# EAGLE board axiom_beta_sensor_cmv12000_zif_v0.18_r1.2 (EAGLE 7.0.0), part 1 of 3
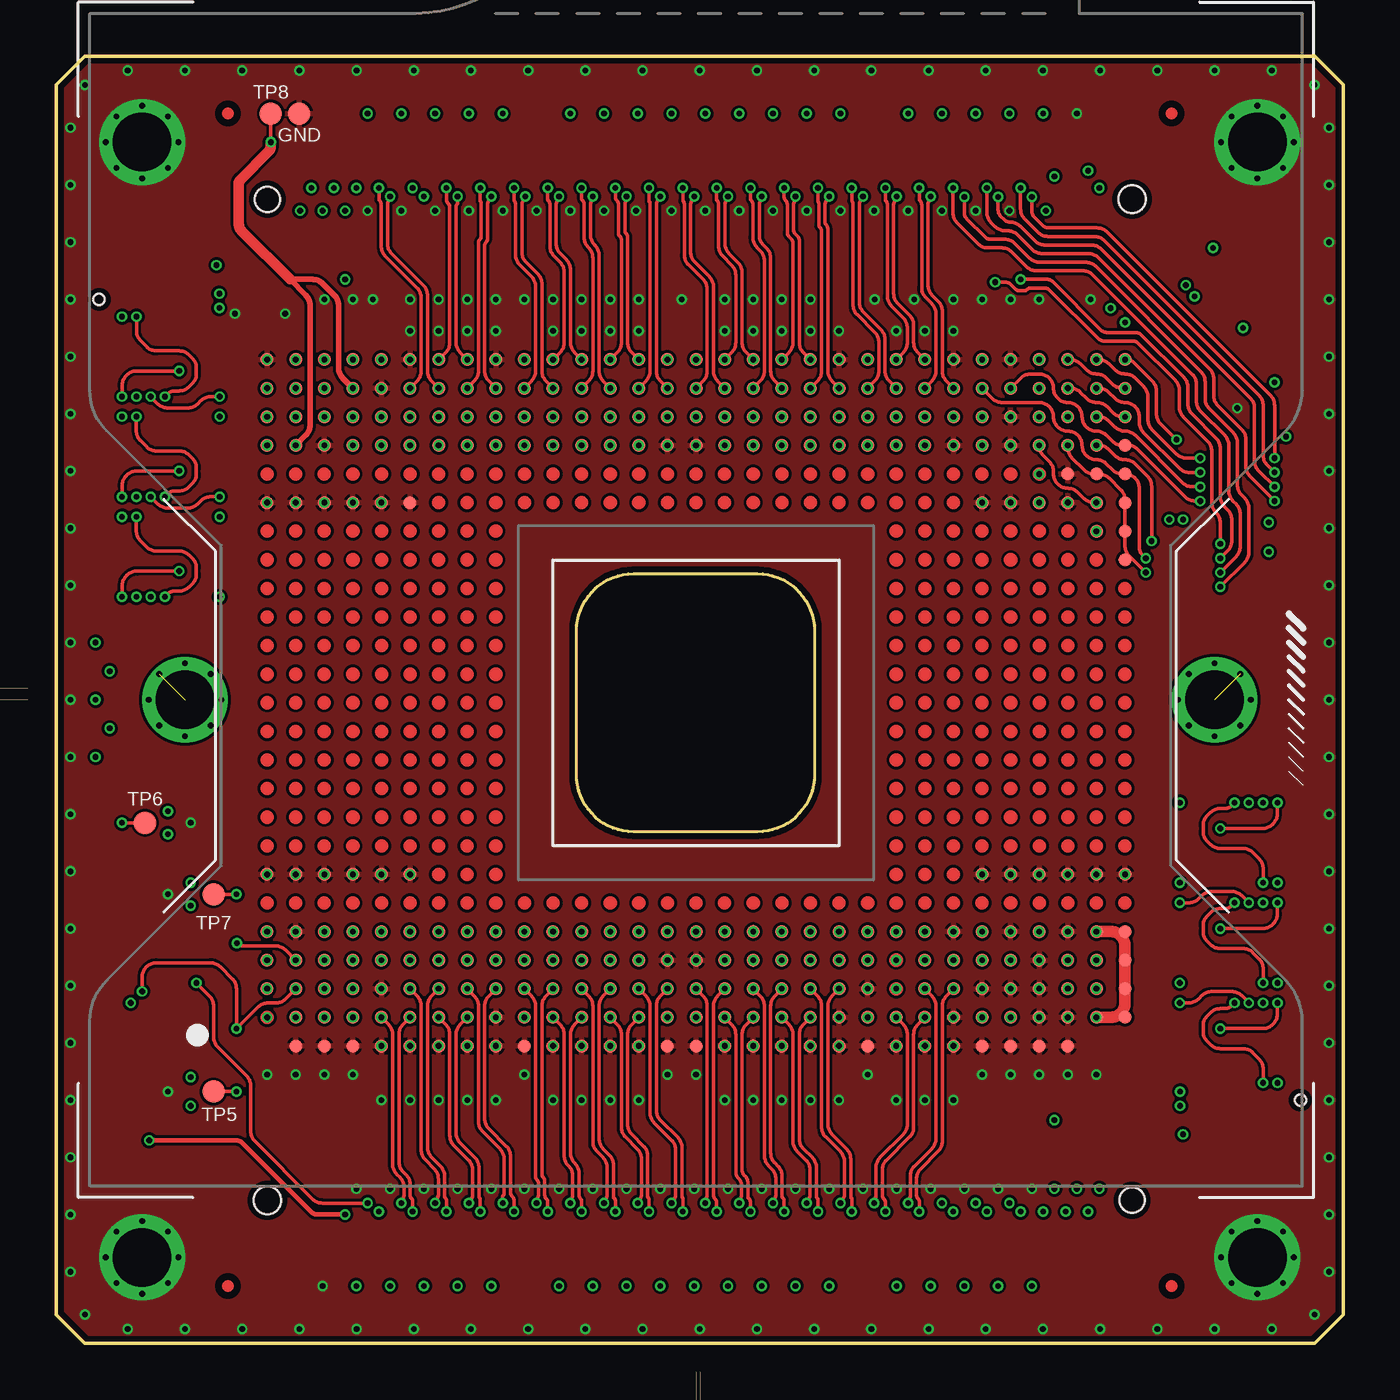
[diagram p0: board, top side]
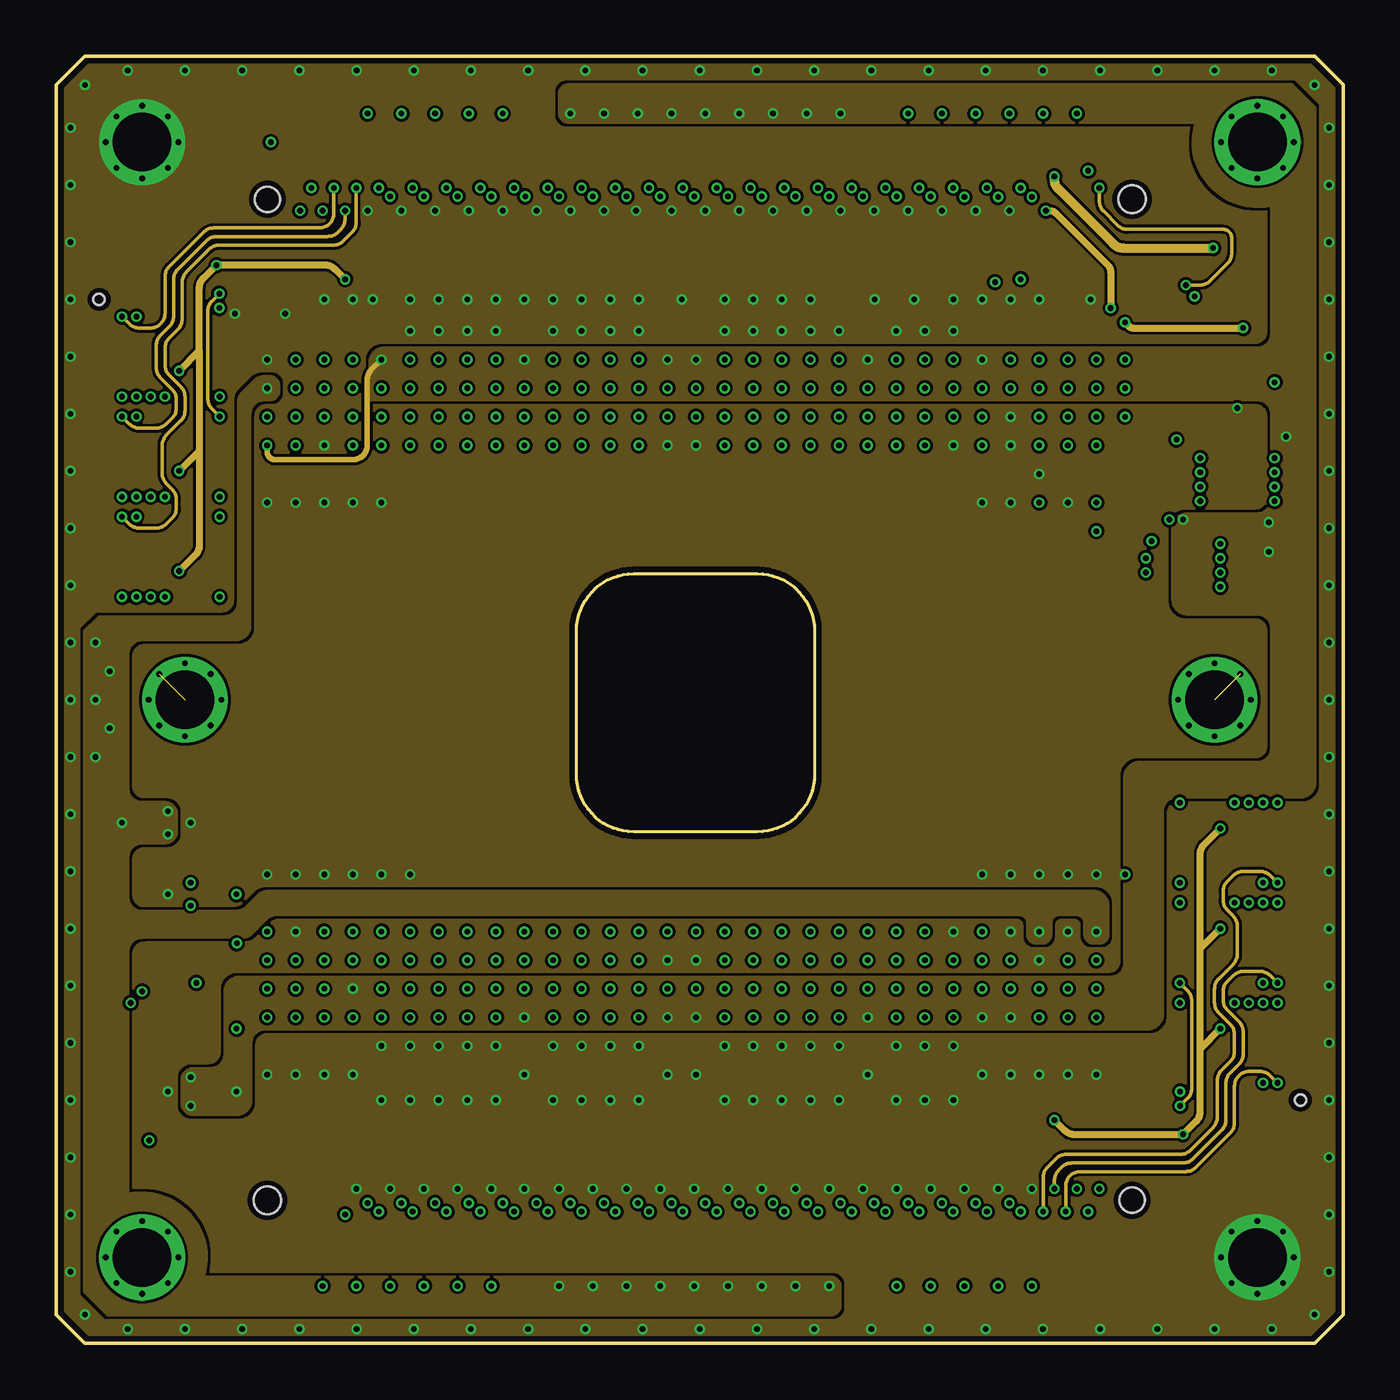
[diagram p1: board, inner layer Route2]
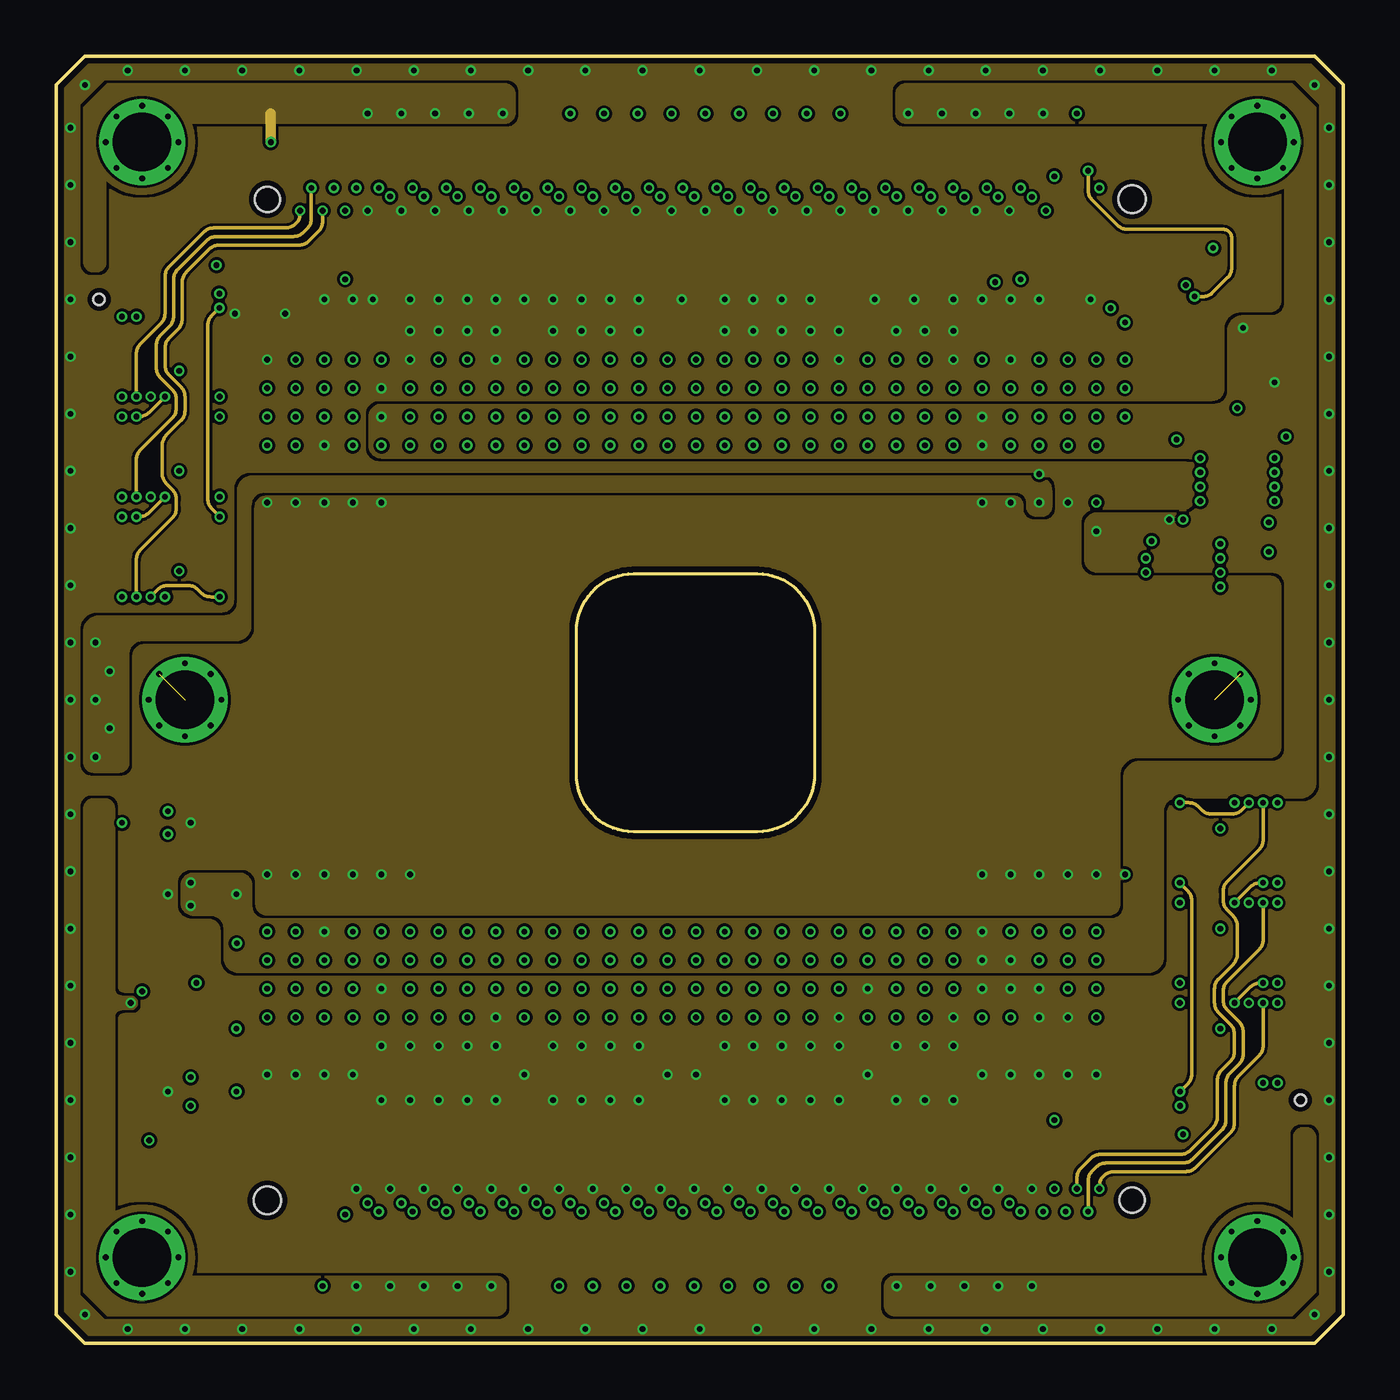
[diagram p2: board, inner layer Route15]
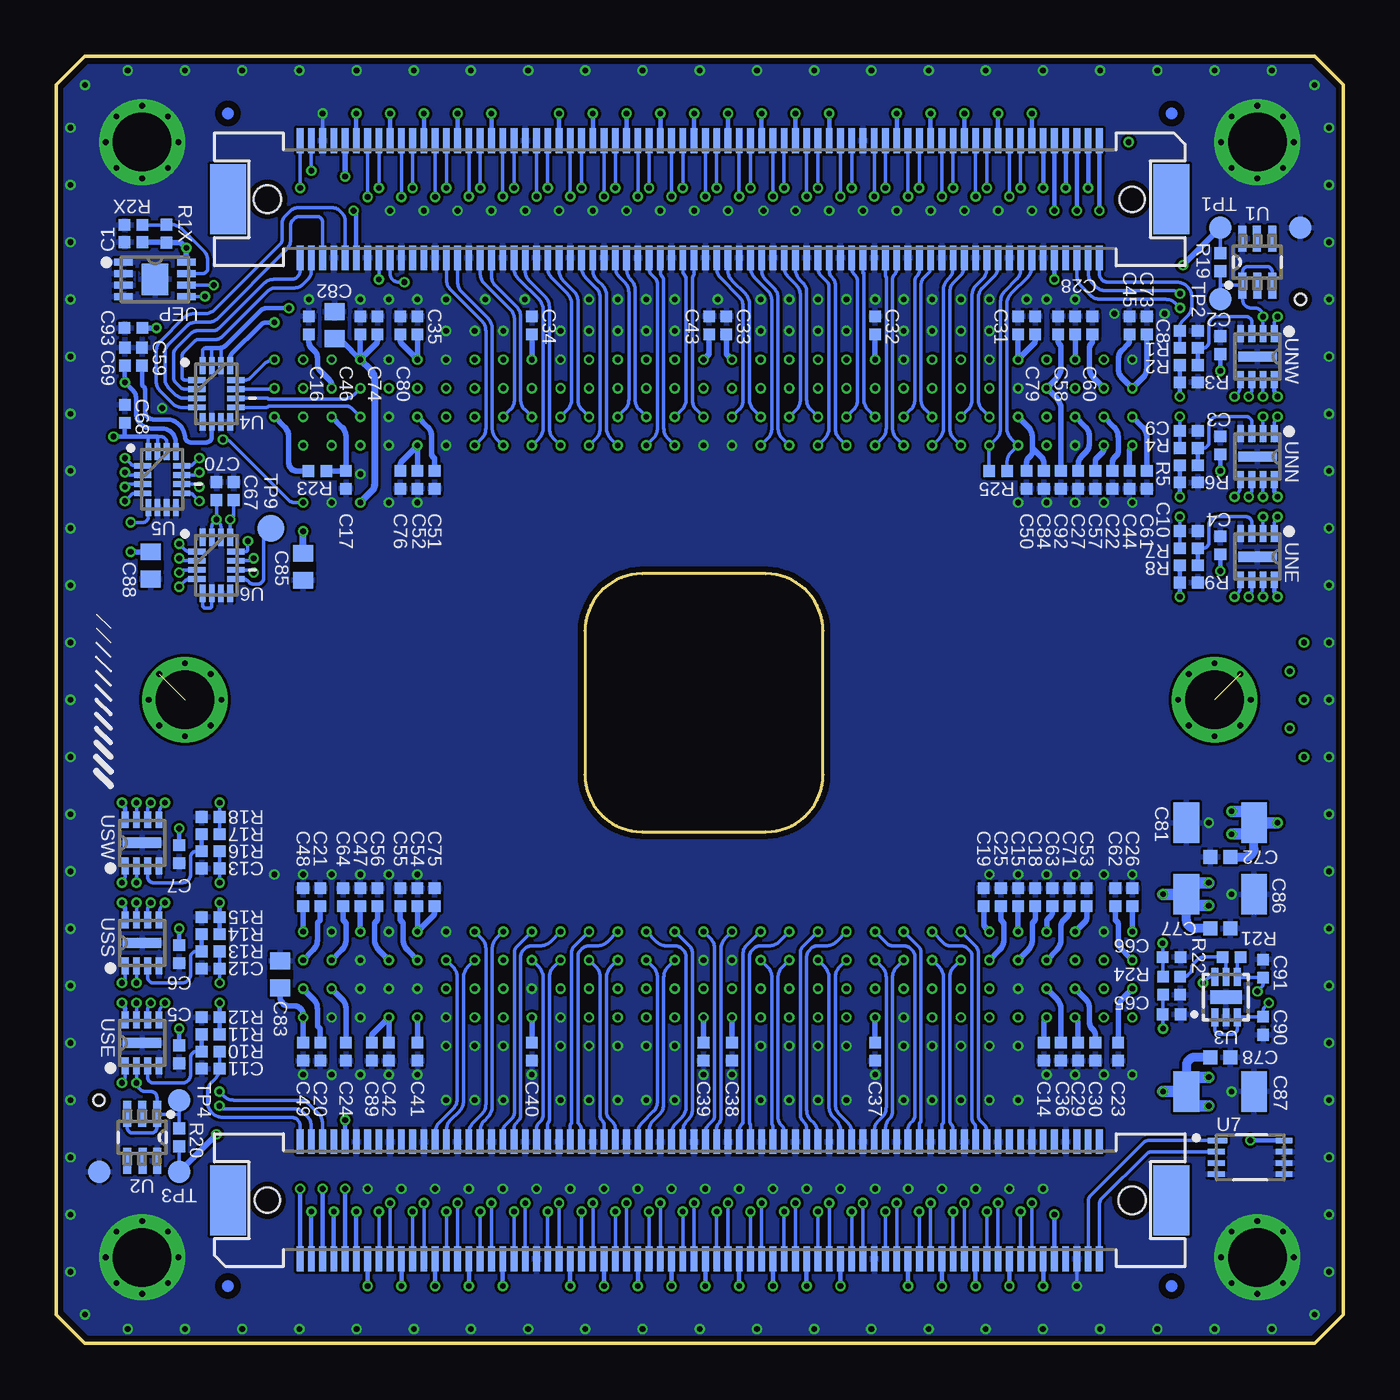
[diagram p3: board, bottom side, seen from below]

Size 57.15 x 57.15 mm. Coordinates in mm from the lower left corner, seen from the top.
Outline: 55.88,57.15 1.27,57.15 0,55.88 0,1.27 1.27,0 55.88,0 57.15,1.27 57.15,55.88 55.88,57.15
Outline: 31.13,22.71 25.64,22.71 arc-90 23.1,25.25 23.1,31.63 arc-90 25.64,34.17 31.13,34.17 arc-90 33.67,31.63 33.67,25.25 arc-90 31.13,22.71
Copper layers (1*2*15*16): Top 0.035559375mm / dielectric 0.17018125mm / Route2 0.01778125mm / dielectric 47mil / Route15 0.01778125mm / dielectric 0.17018125mm / Bottom 0.035559375mm
Design rules "axiom_beta_interface_OSHPark-4layer-tuned *": minimum track width 5mil, minimum drill 10mil, track to track 5mil, track to pad 5mil, pad to pad 5mil, via to via 5mil, smd to smd 5mil, copper to edge 10mil, drill to drill 6mil, minimum pad ring 4mil, minimum via ring 4mil, stop-mask expansion 2mil, vias tented up to drill 15mil, thermal gap 5mil
Net classes: 0 default: width 0.152 mm, drill 0.254 mm; 1 power: width 0.152 mm, drill 0.254 mm
Holes 0.5 mm at 55.25,10.79 1.9,46.36
tKeepout: area 50.8,1.3 to 55.9,6.3; area 50.8,50.8 to 55.9,55.9; area 1.3,1.3 to 6.3,6.3; area 1.3,50.8 to 6.3,55.9
bKeepout: area 1.4,24.8 to 13.4,32.4; area 43.9,24.8 to 56,32.4; area 50.8,1.3 to 55.9,6.3; area 1.3,50.8 to 6.3,55.9; area 50.8,50.8 to 55.9,55.9; area 1.3,1.3 to 6.3,6.3
tRestrict: area 49,54.1 to 50.1,55.2; area 7.1,2 to 8.2,3.1; area 7.1,54.1 to 8.2,55.2; area 49,2 to 50.1,3.1
bRestrict: area 49,54.1 to 50.1,55.2; area 7.1,2 to 8.2,3.1; area 7.1,54.1 to 8.2,55.2; area 49,2 to 50.1,3.1; area 48.9,41.7 to 49.5,41.8; area 48.9,42.1 to 49.5,42.2; area 52,36.9 to 52.1,37.3; area 52.4,36.9 to 52.5,37.3; area 51.6,36.9 to 51.7,37.3; area 49.6,33.1 to 49.7,33.5; area 49.2,33.1 to 49.3,33.5; area 53.9,47.7 to 54.5,47.8; 139 more areas

## Footprints (pad centres in the part's own frame; a part is rotated, then mirrored left to right if it is on the bottom)
0402-C = smd 0.52 x 0.52: 1 -0.4,0; 2 0.4,0
0402-B = smd 0.62 x 0.62: 1 -0.45,0; 2 0.45,0
1206-B = smd 1.15 x 1.8: 1 -1.5,0; 2 1.5,0
0603-C = smd 0.75 x 0.9: 1 -0.6,0; 2 0.6,0
TP10R = smd 1 x 1: TP 0,0
ZIF-604 = smd 0.584 x 0.584: A2 -17.945,-14.105; A3 -16.675,-14.105; A4 -15.405,-14.105; A5 -14.135,-14.105; A6 -12.865,-14.105; A7 -11.595,-14.105; A8 -10.325,-14.105; A9 -9.055,-14.105; A10 -7.785,-14.105; A11 -6.515,-14.105; A12 -5.245,-14.105; A13 -3.975,-14.105; A14 -2.705,-14.105; A15 -1.435,-14.105; A16 -0.165,-14.105; A17 1.105,-14.105; A18 2.375,-14.105; A19 3.645,-14.105; A20 4.915,-14.105; A21 6.185,-14.105; A22 7.455,-14.105; A23 8.725,-14.105; A24 9.995,-14.105; A25 11.265,-14.105; A26 12.535,-14.105; A27 13.805,-14.105; A28 15.075,-14.105; A29 16.345,-14.105; A30 17.615,-14.105; B1 -19.215,-12.835; B2 -17.945,-12.835; B3 -16.675,-12.835; B4 -15.405,-12.835; B5 -14.135,-12.835; B6 -12.865,-12.835; B7 -11.595,-12.835; B8 -10.325,-12.835; B9 -9.055,-12.835; B10 -7.785,-12.835; B11 -6.515,-12.835; B12 -5.245,-12.835; B13 -3.975,-12.835; B14 -2.705,-12.835; B15 -1.435,-12.835; B16 -0.165,-12.835; B17 1.105,-12.835; B18 2.375,-12.835; B19 3.645,-12.835; B20 4.915,-12.835; B21 6.185,-12.835; B22 7.455,-12.835; B24 9.995,-12.835; B25 11.265,-12.835; B26 12.535,-12.835; B27 13.805,-12.835; B28 15.075,-12.835; B29 16.345,-12.835; B30 17.615,-12.835; C1 -19.215,-11.565; C2 -17.945,-11.565; C3 -16.675,-11.565; C4 -15.405,-11.565; C5 -14.135,-11.565; C6 -12.865,-11.565; C7 -11.595,-11.565; C8 -10.325,-11.565; C9 -9.055,-11.565; C10 -7.785,-11.565; C11 -6.515,-11.565; C12 -5.245,-11.565; C13 -3.975,-11.565; C14 -2.705,-11.565; C15 -1.435,-11.565; C16 -0.165,-11.565; C17 1.105,-11.565; C18 2.375,-11.565; C19 3.645,-11.565; C20 4.915,-11.565; C21 6.185,-11.565; C22 7.455,-11.565; C24 9.995,-11.565; C25 11.265,-11.565; C26 12.535,-11.565; C27 13.805,-11.565; C28 15.075,-11.565; C29 16.345,-11.565; C30 17.615,-11.565; D1 -19.215,-10.295; D2 -17.945,-10.295; D3 -16.675,-10.295; D4 -15.405,-10.295; D5 -14.135,-10.295; D6 -12.865,-10.295; D7 -11.595,-10.295; D8 -10.325,-10.295; D9 -9.055,-10.295; D10 -7.785,-10.295; D11 -6.515,-10.295; D12 -5.245,-10.295; D13 -3.975,-10.295; D14 -2.705,-10.295; D15 -1.435,-10.295; D16 -0.165,-10.295; D17 1.105,-10.295; D18 2.375,-10.295; D19 3.645,-10.295; D20 4.915,-10.295; D21 6.185,-10.295; D22 7.455,-10.295; D23 8.725,-10.295; D24 9.995,-10.295; D25 11.265,-10.295; D26 12.535,-10.295; D27 13.805,-10.295; D28 15.075,-10.295; D29 16.345,-10.295; D30 17.615,-10.295; E1 -19.215,11.295; E2 -17.945,11.295; E3 -16.675,11.295; E4 -15.405,11.295; E5 -14.135,11.295; E6 -12.865,11.295; E7 -11.595,11.295; E8 -10.325,11.295; E9 -9.055,11.295; E10 -7.785,11.295; E11 -6.515,11.295; E12 -5.245,11.295; E13 -3.975,11.295; E14 -2.705,11.295; E15 -1.435,11.295; E16 -0.165,11.295; E17 1.105,11.295; E18 2.375,11.295; E19 3.645,11.295; E20 4.915,11.295; E21 6.185,11.295; E22 7.455,11.295; E23 8.725,11.295; E24 9.995,11.295; E25 11.265,11.295; E26 12.535,11.295; E27 13.805,11.295; E28 15.075,11.295; E29 16.345,11.295; E30 17.615,11.295; F1 -19.215,12.565; F2 -17.945,12.565; F3 -16.675,12.565; F4 -15.405,12.565; F5 -14.135,12.565; F6 -12.865,12.565; F7 -11.595,12.565; F8 -10.325,12.565; F9 -9.055,12.565; F10 -7.785,12.565; F11 -6.515,12.565; F12 -5.245,12.565; F13 -3.975,12.565; F14 -2.705,12.565; F15 -1.435,12.565; F16 -0.165,12.565; F17 1.105,12.565; F18 2.375,12.565; F19 3.645,12.565; F20 4.915,12.565; F21 6.185,12.565; F22 7.455,12.565; F23 8.725,12.565; F24 9.995,12.565; F25 11.265,12.565; F26 12.535,12.565; F27 13.805,12.565; F28 15.075,12.565; F29 16.345,12.565; F30 17.615,12.565; G1 -19.215,13.835; G2 -17.945,13.835; G3 -16.675,13.835; G4 -15.405,13.835; G5 -14.135,13.835; G6 -12.865,13.835; G7 -11.595,13.835; G8 -10.325,13.835; G9 -9.055,13.835; G10 -7.785,13.835; G11 -6.515,13.835; G12 -5.245,13.835; G13 -3.975,13.835; G14 -2.705,13.835; G15 -1.435,13.835; G16 -0.165,13.835; G17 1.105,13.835; G18 2.375,13.835; G19 3.645,13.835; G20 4.915,13.835; G21 6.185,13.835; G22 7.455,13.835; G23 8.725,13.835; G24 9.995,13.835; G25 11.265,13.835; G26 12.535,13.835; G27 13.805,13.835; G28 15.075,13.835; G29 16.345,13.835; G30 17.615,13.835; H1 -19.215,15.105; H2 -17.945,15.105; H3 -16.675,15.105; H4 -15.405,15.105; H5 -14.135,15.105; H6 -12.865,15.105; H7 -11.595,15.105; H8 -10.325,15.105; H9 -9.055,15.105; H10 -7.785,15.105; H11 -6.515,15.105; H12 -5.245,15.105; H13 -3.975,15.105; H14 -2.705,15.105; H15 -1.435,15.105; H16 -0.165,15.105; H17 1.105,15.105; H18 2.375,15.105; H19 3.645,15.105; H20 4.915,15.105; H21 6.185,15.105; H22 7.455,15.105; H23 8.725,15.105; H24 9.995,15.105; H25 11.265,15.105; H26 12.535,15.105; H27 13.805,15.105; H28 15.075,15.105; H29 16.345,15.105; H30 17.615,15.105; X2 -17.945,-15.375; X3 -16.675,-15.375; X4 -15.405,-15.375; X5 -14.135,-15.375; X6 -12.865,-15.375; X7 -11.595,-15.375; X8 -10.325,-15.375; X9 -9.055,-15.375; X10 -7.785,-15.375; X11 -6.515,-15.375; X12 -5.245,-15.375; X13 -3.975,-15.375; X14 -2.705,-15.375; X15 -1.435,-15.375; X16 -0.165,-15.375; X17 1.105,-15.375; X18 2.375,-15.375; X19 3.645,-15.375; X20 4.915,-15.375; X21 6.185,-15.375; X22 7.455,-15.375; X23 8.725,-15.375; X24 9.995,-15.375; X25 11.265,-15.375; X26 12.535,-15.375; X27 13.805,-15.375; X28 15.075,-15.375; X29 16.345,-15.375; Y1 -19.215,-7.755; Y2 -17.945,-7.755; Y3 -16.675,-7.755; Y4 -15.405,-7.755; Y5 -14.135,-7.755; Y6 -12.865,-7.755; Y7 12.535,-7.755; Y8 13.805,-7.755; Y9 15.075,-7.755; Y10 16.345,-7.755; Y11 17.615,-7.755; Y12 18.885,-7.755; Y13 -19.215,8.755; Y14 -17.945,8.755; Y15 -16.675,8.755; Y16 -15.405,8.755; Y17 -14.135,8.755; Y18 -12.865,8.755; Y19 12.535,8.755; Y20 13.805,8.755; Y21 15.075,8.755; Y22 16.345,8.755; Y23 17.615,8.755; Y24 18.885,8.755; Z1 18.885,-14.105; Z2 18.885,-12.835; Z3 18.885,-11.565; Z4 18.885,-10.295; Z5 18.885,6.215; Z6 18.885,7.485; Z7 18.885,10.025; Z8 18.885,11.295; Z9 18.885,12.565; Z10 18.885,13.835; Z11 18.885,15.105; Z12 17.615,7.485; Z13 17.615,10.025; Z14 16.345,10.025
TP12R = smd 1.2 x 1.2: TP 0,0
SOT65P210X110-6N = smd 1.168 x 0.356: 1 -1.041,0.66; 2 -1.041,0; 3 -1.041,-0.66; 4 1.041,-0.66; 5 1.041,0.025; 6 1.041,0.66
MLF-6 = smd 0.3 x 0.8: 1 -0.5,-0.9; 2 0,-0.9; 3 0.5,-0.9; 4 0.5,0.9; 5 0,0.9; 6 -0.5,0.9 | smd 1.4 x 0.6: EP 0,0
QFN40P185X265X55-16N = smd 0.762 x 0.254: 1 -0.864,0.61; 2 -0.864,0.203; 3 -0.864,-0.203; 4 -0.864,-0.61; 9 0.864,-0.61; 10 0.864,-0.203; 11 0.864,0.203; 12 0.864,0.61 | smd 0.254 x 0.762: 5 -0.61,-1.245; 6 -0.203,-1.245; 7 0.203,-1.245; 8 0.61,-1.245; 13 0.61,1.245; 14 0.203,1.245; 15 -0.203,1.245; 16 -0.61,1.245
SOT996-2/3 = smd 0.25 x 0.85: 1 -0.75,-1.45 | smd 0.25 x 0.75: 2 -0.25,-1.5; 3 0.25,-1.5; 4 0.75,-1.5; 5 0.75,1.5; 6 0.25,1.5; 7 -0.25,1.5; 8 -0.75,1.5
DFN200X300X100-9N = smd 0.813 x 0.305: 1 -1.397,0.762; 2 -1.397,0.254; 3 -1.397,-0.254; 4 -1.397,-0.762; 5 1.397,-0.762; 6 1.397,-0.254; 7 1.397,0.254; 8 1.397,0.762 | smd 1.194 x 1.397: EP 0,0
DFN200X200X100-9N = smd 0.75 x 0.3: 1 -1.025,0.75; 2 -1.025,0.25; 3 -1.025,-0.25; 4 -1.025,-0.75; 5 1.025,-0.75; 6 1.025,-0.25; 7 1.025,0.25; 8 1.025,0.75 | smd 0.45 x 1.7: EP 0,0
FX10A-144P = smd 0.3 x 1.1: 1 -17.75,-2.6; 2 -17.75,2.6; 3 -17.25,-2.6; 4 -17.25,2.6; 5 -16.75,-2.6; 6 -16.75,2.6; 7 -16.25,-2.6; 8 -16.25,2.6; 9 -15.75,-2.6; 10 -15.75,2.6; 11 -15.25,-2.6; 12 -15.25,2.6; 13 -14.75,-2.6; 14 -14.75,2.6; 15 -14.25,-2.6; 16 -14.25,2.6; 17 -13.75,-2.6; 18 -13.75,2.6; 19 -13.25,-2.6; 20 -13.25,2.6; 21 -12.75,-2.6; 22 -12.75,2.6; 23 -12.25,-2.6; 24 -12.25,2.6; 25 -11.75,-2.6; 26 -11.75,2.6; 27 -11.25,-2.6; 28 -11.25,2.6; 29 -10.75,-2.6; 30 -10.75,2.6; 31 -10.25,-2.6; 32 -10.25,2.6; 33 -9.75,-2.6; 34 -9.75,2.6; 35 -9.25,-2.6; 36 -9.25,2.6; 37 -8.75,-2.6; 38 -8.75,2.6; 39 -8.25,-2.6; 40 -8.25,2.6; 41 -7.75,-2.6; 42 -7.75,2.6; 43 -7.25,-2.6; 44 -7.25,2.6; 45 -6.75,-2.6; 46 -6.75,2.6; 47 -6.25,-2.6; 48 -6.25,2.6; 49 -5.75,-2.6; 50 -5.75,2.6; 51 -5.25,-2.6; 52 -5.25,2.6; 53 -4.75,-2.6; 54 -4.75,2.6; 55 -4.25,-2.6; 56 -4.25,2.6; 57 -3.75,-2.6; 58 -3.75,2.6; 59 -3.25,-2.6; 60 -3.25,2.6; 61 -2.75,-2.6; 62 -2.75,2.6; 63 -2.25,-2.6; 64 -2.25,2.6; 65 -1.75,-2.6; 66 -1.75,2.6; 67 -1.25,-2.6; 68 -1.25,2.6; 69 -0.75,-2.6; 70 -0.75,2.6; 71 -0.25,-2.6; 72 -0.25,2.6; 73 0.25,-2.6; 74 0.25,2.6; 75 0.75,-2.6; 76 0.75,2.6; 77 1.25,-2.6; 78 1.25,2.6; 79 1.75,-2.6; 80 1.75,2.6; 81 2.25,-2.6; 82 2.25,2.6; 83 2.75,-2.6; 84 2.75,2.6; 85 3.25,-2.6; 86 3.25,2.6; 87 3.75,-2.6; 88 3.75,2.6; 89 4.25,-2.6; 90 4.25,2.6; 91 4.75,-2.6; 92 4.75,2.6; 93 5.25,-2.6; 94 5.25,2.6; 95 5.75,-2.6; 96 5.75,2.6; 97 6.25,-2.6; 98 6.25,2.6; 99 6.75,-2.6; 100 6.75,2.6; 101 7.25,-2.6; 102 7.25,2.6; 103 7.75,-2.6; 104 7.75,2.6; 105 8.25,-2.6; 106 8.25,2.6; 107 8.75,-2.6; 108 8.75,2.6; 109 9.25,-2.6; 110 9.25,2.6; 111 9.75,-2.6; 112 9.75,2.6; 113 10.25,-2.6; 114 10.25,2.6; 115 10.75,-2.6; 116 10.75,2.6; 117 11.25,-2.6; 118 11.25,2.6; 119 11.75,-2.6; 120 11.75,2.6; 121 12.25,-2.6; 122 12.25,2.6; 123 12.75,-2.6; 124 12.75,2.6; 125 13.25,-2.6; 126 13.25,2.6; 127 13.75,-2.6; 128 13.75,2.6; 129 14.25,-2.6; 130 14.25,2.6; 131 14.75,-2.6; 132 14.75,2.6; 133 15.25,-2.6; 134 15.25,2.6; 135 15.75,-2.6; 136 15.75,2.6; 137 16.25,-2.6; 138 16.25,2.6; 139 16.75,-2.6; 140 16.75,2.6; 141 17.25,-2.6; 142 17.25,2.6; 143 17.75,-2.6; 144 17.75,2.6 | smd 1.6 x 3.1: M1 -20.95,0; M2 20.95,0 | hole 1.125: -19.2,0 | hole 1.225: 19.2,0

## Placement (x,y rotation side)
C1  100n  [0402-C]  53.72,48.89 180 bottom
C2  100n  [0402-C]  5.46,44.32 90 bottom
C3  100n  [0402-C]  5.46,39.88 90 bottom
C4  100n  [0402-C]  5.46,35.43 90 bottom
C5  100n  [0402-C]  51.69,12.83 270 bottom
C6  100n  [0402-C]  51.69,17.27 270 bottom
C7  100n  [0402-C]  51.69,21.72 270 bottom
C8  1µ  [0402-C]  6.86,44.96 0 bottom
C9  1µ  [0402-C]  6.86,40.51 0 bottom
C10  1µ  [0402-C]  6.86,36.07 0 bottom
C11  1µ  [0402-C]  50.29,12.19 180 bottom
C12  1µ  [0402-C]  50.29,16.64 180 bottom
C13  1µ  [0402-C]  50.29,21.08 180 bottom
C14  100n  [0402-C]  13.3,12.95 270 bottom
C15  100n  [0402-C]  14.44,19.8 90 bottom
C16  100n  [0402-C]  45.94,45.2 90 bottom
C17  100n  [0402-C]  44.28,38.35 270 bottom
C18  100n  [0402-C]  13.68,19.8 90 bottom
C19  100n  [0402-C]  15.96,19.8 90 bottom
C20  100n  [0402-C]  45.43,12.95 270 bottom
C21  100n  [0402-C]  45.43,19.8 90 bottom
C22  100n  [0402-C]  10.25,38.35 90 bottom
C23  100n  [0402-C]  10,12.95 90 bottom
C24  100n  [0402-C]  44.28,12.95 90 bottom
C25  100n  [0402-C]  15.2,19.8 270 bottom
C26  100n  [0402-C]  9.36,19.8 270 bottom
C27  100n  [0402-C]  11.77,38.35 90 bottom
C28  100n  [0402-C]  11.9,45.2 270 bottom
C29  100n  [0402-C]  11.77,12.95 270 bottom
C30  100n  [0402-C]  11.01,12.95 270 bottom
C31  100n  [0402-C]  14.44,45.2 90 bottom
C32  100n  [0402-C]  20.79,45.2 90 bottom
C33  100n  [0402-C]  27.39,45.2 90 bottom
C34  100n  [0402-C]  36.03,45.2 90 bottom
C35  100n  [0402-C]  41.11,45.2 90 bottom
C36  100n  [0402-C]  12.54,12.95 270 bottom
C37  100n  [0402-C]  20.79,12.95 270 bottom
C38  100n  [0402-C]  27.14,12.95 270 bottom
C39  100n  [0402-C]  28.41,12.95 270 bottom
C40  100n  [0402-C]  36.03,12.95 270 bottom
C41  100n  [0402-C]  41.11,12.95 270 bottom
C42  100n  [0402-C]  42.38,12.95 270 bottom
C43  100n  [0402-C]  28.16,45.2 90 bottom
C44  100n  [0402-C]  9.49,38.35 270 bottom
C45  100n  [0402-C]  9.49,45.2 90 bottom
C46  100n  [0402-C]  43.65,45.2 90 bottom
C47  100n  [0402-C]  43.65,19.8 90 bottom
C48  100n  [0402-C]  46.19,19.8 90 bottom
C49  100n  [0402-C]  46.19,12.95 270 bottom
C50  100n  [0402-C]  14.06,38.35 270 bottom
C51  100n  [0402-C]  40.35,38.35 270 bottom
C52  100n  [0402-C]  41.11,38.35 270 bottom
C53  100n  [0402-C]  11.39,19.8 90 bottom
C54  100n  [0402-C]  41.11,19.8 90 bottom
C55  100n  [0402-C]  41.87,19.8 90 bottom
C56  100n  [0402-C]  42.89,19.8 90 bottom
C57  100n  [0402-C]  11.01,38.35 270 bottom
C58  100n  [0402-C]  12.66,45.2 90 bottom
C59  100n  [0402-C]  53.34,43.81 90 bottom
C60  100n  [0402-C]  11.14,45.2 90 bottom
C61  100n  [0402-C]  8.72,38.35 270 bottom
C62  100n  [0402-C]  10.12,19.8 90 bottom
C63  100n  [0402-C]  12.92,19.8 90 bottom
C64  100n  [0402-C]  44.41,19.8 90 bottom
C65  100n  [0402-C]  7.62,14.6 0 bottom
C66  100n  [0402-C]  7.62,17.14 0 bottom
C67  100n  [0402-C]  49.28,37.85 90 bottom
C68  100n  [0402-C]  54.1,41.27 90 bottom
C69  100n  [0402-C]  54.1,43.81 90 bottom
C70  100n  [0402-C]  50.04,37.85 90 bottom
C71  100n  [0402-C]  12.15,19.8 90 bottom
C72  4µ7  [0402-B]  5.46,21.59 180 bottom
C73  4µ7  [0402-C]  8.72,45.2 90 bottom
C74  4µ7  [0402-C]  42.89,45.2 90 bottom
C75  4µ7  [0402-C]  40.35,19.8 90 bottom
C76  4µ7  [0402-C]  41.87,38.35 270 bottom
C77  4µ7  [0402-B]  5.46,18.41 0 bottom
C78  4µ7  [0402-B]  5.46,12.7 0 bottom
C79  4µ7  [0402-C]  13.68,45.2 90 bottom
C80  4µ7  [0402-C]  41.87,45.2 90 bottom
C81  100µ  [1206-B]  5.46,23.11 180 bottom
C82  10µ  [0603-C]  44.79,45.2 90 bottom
C83  10µ  [0603-C]  47.21,16.38 90 bottom
C84  4µ7  [0402-C]  13.3,38.35 270 bottom
C85  10µ  [0603-C]  46.19,34.48 270 bottom
C86  100µ  [1206-B]  5.46,19.94 0 bottom
C87  100µ  [1206-B]  5.46,11.18 0 bottom
C88  10µ  [0603-C]  52.96,34.54 270 bottom
C89  4µ7  [0402-C]  43.14,12.95 270 bottom
C90  4µ7  [0402-C]  3.56,14.1 270 bottom
C91  4µ7  [0402-C]  3.56,16.64 270 bottom
C92  4µ7  [0402-C]  12.54,38.35 270 bottom
C93  100n  [0402-C]  53.72,45.09 180 bottom
GND  TPTP10R  [TP10R]  10.79,54.61 0 top
GND75  TPTP10R  [TP10R]  1.9,49.53 180 bottom
GND77  TPTP10R  [TP10R]  55.25,7.62 180 bottom
PARALLELLA  [PARALLELLA-FRAME]  28.57,28.57 0 top
R1  28k7  [0402-C]  6.86,44.2 0 bottom
R1X  10k  [0402-C]  52.26,49.28 90 bottom
R2  3k32  [0402-C]  6.86,43.43 180 bottom
R2X  [0402-C]  53.72,49.66 180 bottom
R3  16k9  [0402-C]  6.86,42.67 0 bottom
R4  15k4  [0402-C]  6.86,39.75 0 bottom
R5  3k09  [0402-C]  6.86,38.99 180 bottom
R6  30k9  [0402-C]  6.86,38.23 0 bottom
R7  28k7  [0402-C]  6.86,35.31 0 bottom
R8  3k32  [0402-C]  6.86,34.54 180 bottom
R9  16k9  [0402-C]  6.86,33.78 0 bottom
R10  [0402-C]  50.29,12.95 180 bottom
R11  [0402-C]  50.29,13.72 0 bottom
R12  [0402-C]  50.29,14.48 180 bottom
R13  22k6  [0402-C]  50.29,17.4 180 bottom
R14  9k53  [0402-C]  50.29,18.16 0 bottom
R15  16k9  [0402-C]  50.29,18.92 180 bottom
R16  18k7  [0402-C]  50.29,21.84 180 bottom
R17  13k3  [0402-C]  50.29,22.61 0 bottom
R18  16k9  [0402-C]  50.29,23.37 180 bottom
R19  18k  [0402-C]  5.46,48.01 270 bottom
R20  18k  [0402-C]  51.69,9.14 90 bottom
R21  5k9  [0402-C]  4.95,17.14 0 bottom
R22  14k3  [0402-C]  7.24,15.88 90 bottom
R23  0R  [0402-C]  45.55,38.73 0 bottom
R24  0R  [0402-C]  8,15.88 90 bottom
R25  100R  [0402-C]  15.33,38.73 180 bottom
SENSOR  CMV12000-ZIF  [ZIF-604]  28.57,28.57 0 top
TP1  TPTP10R  [TP10R]  5.46,49.53 0 bottom
TP2  TPTP10R  [TP10R]  5.46,46.36 0 bottom
TP3  TPTP10R  [TP10R]  51.69,7.62 0 bottom
TP4  TPTP10R  [TP10R]  51.69,10.79 0 bottom
TP5  TPTP10R  [TP10R]  6.98,11.18 0 top
TP6  TPTP10R  [TP10R]  3.94,23.11 0 top
TP7  TPTP10R  [TP10R]  6.98,19.94 0 top
TP8  TPTP10R  [TP10R]  9.52,54.61 0 top
TP9  TPTP12R  [TP12R]  47.62,36.2 0 bottom
U1  TLV431DCK  [SOT65P210X110-6N]  3.81,48.01 90 bottom
U2  TLV431DCK  [SOT65P210X110-6N]  53.34,9.14 270 bottom
U3  MIC47050  [MLF-6]  5.21,15.37 0 bottom
U4  SN74AVC4T774RSV  [QFN40P185X265X55-16N]  50.04,42.16 0 bottom
U5  SN74AVC4T774RSV  [QFN40P185X265X55-16N]  52.45,38.35 0 bottom
U6  SN74AVC4T774RSV  [QFN40P185X265X55-16N]  50.04,34.54 0 bottom
U7  LM75BGD  [SOT996-2/3]  4.13,8.25 270 bottom
U$1  [µZ-FRAME]  28.57,28.57 0 top
UEP  BR24G04NUX  [DFN200X300X100-9N]  52.77,47.24 0 bottom
UNE  TS332IQ2T  [DFN200X200X100-9N]  3.81,34.92 270 bottom
UNN  TS332IQ2T  [DFN200X200X100-9N]  3.81,39.37 270 bottom
UNW  TS332IQ2T  [DFN200X200X100-9N]  3.81,43.81 270 bottom
USE  TS332IQ2T  [DFN200X200X100-9N]  53.34,13.33 90 bottom
USS  TS332IQ2T  [DFN200X200X100-9N]  53.34,17.78 90 bottom
USW  TS332IQ2T  [DFN200X200X100-9N]  53.34,22.23 90 bottom
X-NORTH  FX10-144P  [FX10A-144P]  28.57,50.8 180 bottom
X-SOUTH  FX10-144P  [FX10A-144P]  28.57,6.35 0 bottom

## Library data of the parts
C1-C93 R1 R1X R2 R2X R3-R25 = generic-rcl
GND GND75 GND77 TP1-TP9 = testpad
PARALLELLA = parallella
SENSOR = cmosis
U1 U2 = vref
U3 = ldo
U4-U6 = lvltrans
U7 = lm75
U$1 = microzed
UEP = eeprom
UNE UNN UNW USE USS USW = comparator
X-NORTH X-SOUTH = fx10

## Nets
CLK_IN: SENSOR.E30 U6.12
FRAME_REQ: SENSOR.G30 U5.11
GND: C1.2 C2.2 C3.2 C4.2 C5.2 C6.2 C7.2 C8.2 C9.2 C10.2 C11.2 C12.2 C13.2 C14.2 C15.2 C16.2 C17.2 C18.2 C19.2 C20.2 C21.2 C22.1 C23.1 C24.1 C25.1 C26.1 C27.1 C28.1 C29.2 C30.2 C31.2 C32.2 C33.2 C34.2 C35.2 C36.2 C37.2 C38.2 C39.2 C40.2 C41.2 C42.2 C43.2 C44.2 C45.2 C46.2 C47.2 C48.2 C49.2 C50.2 C51.2 C52.2 C53.2 C54.2 C55.2 C56.2 C57.2 C58.2 C59.2 C60.2 C61.2 C62.2 C63.2 C64.2 C65.2 C66.2 C67.2 C68.2 C69.2 C70.2 C71.2 C72.2 C73.2 C74.2 C75.2 C76.2 C77.2 C78.2 C79.2 C80.2 C81.2 C82.2 C83.2 C84.2 C85.2 C86.2 C87.2 C88.2 C89.2 C90.2 C91.1 C92.2 C93.2 GND75.TP GND77.TP GND.TP R2X.2 R3.2 R6.2 R9.2 R12.2 R15.2 R18.2 R22.1 SENSOR.A9 SENSOR.A21 SENSOR.A25 SENSOR.A28 SENSOR.A29 SENSOR.B5 SENSOR.B22 SENSOR.B26 SENSOR.B27 SENSOR.B28 SENSOR.C15 SENSOR.C16 SENSOR.C28 SENSOR.D2 SENSOR.D25 SENSOR.D27 SENSOR.D29 SENSOR.E3 SENSOR.E15 SENSOR.E16 SENSOR.E25 SENSOR.E27 SENSOR.F27 SENSOR.G5 SENSOR.H1 SENSOR.H6 SENSOR.H9 SENSOR.H21 SENSOR.H25 SENSOR.H27 SENSOR.X2 SENSOR.X3 SENSOR.X4 SENSOR.X5 SENSOR.X6 SENSOR.X7 SENSOR.X8 SENSOR.X9 SENSOR.X10 SENSOR.X11 SENSOR.X12 SENSOR.X13 SENSOR.X14 SENSOR.X15 SENSOR.X16 SENSOR.X17 SENSOR.X18 SENSOR.X19 SENSOR.X20 SENSOR.X21 SENSOR.X22 SENSOR.X23 SENSOR.X24 SENSOR.X25 SENSOR.X26 SENSOR.X27 SENSOR.X28 SENSOR.X29 SENSOR.Y1 SENSOR.Y2 SENSOR.Y3 SENSOR.Y4 SENSOR.Y5 SENSOR.Y6 SENSOR.Y7 SENSOR.Y8 SENSOR.Y9 SENSOR.Y10 SENSOR.Y11 SENSOR.Y12 SENSOR.Y13 SENSOR.Y14 SENSOR.Y15 SENSOR.Y16 SENSOR.Y17 SENSOR.Y18 SENSOR.Y19 SENSOR.Y20 SENSOR.Y22 SENSOR.Z14 U1.6 U2.6 U3.2 U3.EP U4.5 U4.7 U4.8 U5.6 U5.7 U5.8 U6.7 U6.8 U6.16 U7.4 U7.5 U7.6 U7.7 UEP.1 UEP.2 UEP.3 UEP.4 UEP.EP UNE.4 UNE.EP UNN.4 UNN.EP UNW.4 UNW.EP USE.4 USE.EP USS.4 USS.EP USW.4 USW.EP X-NORTH.12 X-NORTH.18 X-NORTH.24 X-NORTH.30 X-NORTH.36 X-NORTH.42 X-NORTH.43 X-NORTH.48 X-NORTH.54 X-NORTH.60 X-NORTH.66 X-NORTH.72 X-NORTH.78 X-NORTH.84 X-NORTH.90 X-NORTH.96 X-NORTH.102 X-NORTH.103 X-NORTH.108 X-NORTH.114 X-NORTH.120 X-NORTH.126 X-NORTH.132 X-NORTH.138 X-NORTH.139 X-SOUTH.12 X-SOUTH.18 X-SOUTH.24 X-SOUTH.30 X-SOUTH.36 X-SOUTH.42 X-SOUTH.43 X-SOUTH.48 X-SOUTH.54 X-SOUTH.60 X-SOUTH.66 X-SOUTH.72 X-SOUTH.78 X-SOUTH.84 X-SOUTH.90 X-SOUTH.96 X-SOUTH.102 X-SOUTH.103 X-SOUTH.108 X-SOUTH.114 X-SOUTH.120 X-SOUTH.126 X-SOUTH.132 X-SOUTH.138 X-SOUTH.139
N00_N: R25.2 SENSOR.E6 X-NORTH.16
N00_P: R25.1 SENSOR.E5 X-NORTH.14
N01_N: SENSOR.G7 X-NORTH.17
N01_P: SENSOR.G6 X-NORTH.15
N02_N: SENSOR.F7 X-NORTH.22
N02_P: SENSOR.F6 X-NORTH.20
N03_N: X-NORTH.23
N03_P: X-NORTH.21
N04_N: SENSOR.E8 X-NORTH.28
N04_P: SENSOR.E7 X-NORTH.26
N05_N: SENSOR.H8 X-NORTH.29
N05_P: SENSOR.H7 X-NORTH.27
N06_N: SENSOR.F9 X-NORTH.34
N06_P: SENSOR.F8 X-NORTH.32
N07_N: SENSOR.G9 X-NORTH.35
N07_P: SENSOR.G8 X-NORTH.33
N08_N: SENSOR.E10 X-NORTH.40
N08_P: SENSOR.E9 X-NORTH.38
N09_N: SENSOR.G11 X-NORTH.41
N09_P: SENSOR.G10 X-NORTH.39
N10_N: SENSOR.F11 X-NORTH.46
N10_P: SENSOR.F10 X-NORTH.44
N11_N: SENSOR.H12 X-NORTH.47
N11_P: SENSOR.H11 X-NORTH.45
N12_N: SENSOR.E12 X-NORTH.52
N12_P: SENSOR.E11 X-NORTH.50
N13_N: SENSOR.G13 X-NORTH.53
N13_P: SENSOR.G12 X-NORTH.51
N14_N: SENSOR.F13 X-NORTH.58
N14_P: SENSOR.F12 X-NORTH.56
N15_N: SENSOR.H14 X-NORTH.59
N15_P: SENSOR.H13 X-NORTH.57
N16_N: SENSOR.E14 X-NORTH.64
N16_P: SENSOR.E13 X-NORTH.62
N17_N: SENSOR.G15 X-NORTH.65
N17_P: SENSOR.G14 X-NORTH.63
N18_N: SENSOR.F15 X-NORTH.70
N18_P: SENSOR.F14 X-NORTH.68
N19_N: SENSOR.G17 X-NORTH.71
N19_P: SENSOR.G16 X-NORTH.69
N20_N: SENSOR.F17 X-NORTH.76
N20_P: SENSOR.F16 X-NORTH.74
N21_N: SENSOR.H18 X-NORTH.77
N21_P: SENSOR.H17 X-NORTH.75
N22_N: SENSOR.E18 X-NORTH.82
N22_P: SENSOR.E17 X-NORTH.80
N23_N: SENSOR.G19 X-NORTH.83
N23_P: SENSOR.G18 X-NORTH.81
N24_N: SENSOR.F19 X-NORTH.88
N24_P: SENSOR.F18 X-NORTH.86
N25_N: SENSOR.H20 X-NORTH.89
N25_P: SENSOR.H19 X-NORTH.87
N26_N: SENSOR.E20 X-NORTH.94
N26_P: SENSOR.E19 X-NORTH.92
N27_N: SENSOR.G21 X-NORTH.95
N27_P: SENSOR.G20 X-NORTH.93
N28_N: SENSOR.F21 X-NORTH.100
N28_P: SENSOR.F20 X-NORTH.98
N29_N: SENSOR.G23 X-NORTH.101
N29_P: SENSOR.G22 X-NORTH.99
N30_N: SENSOR.E22 X-NORTH.106
N30_P: SENSOR.E21 X-NORTH.104
N31_N: SENSOR.H24 X-NORTH.107
N31_P: SENSOR.H23 X-NORTH.105
N32_N: SENSOR.F23 X-NORTH.112
N32_P: SENSOR.F22 X-NORTH.110
N33_N: SENSOR.G25 X-NORTH.113
N33_P: SENSOR.G24 X-NORTH.111
N34_N: SENSOR.E24 X-NORTH.118
N34_P: SENSOR.E23 X-NORTH.116
N35_N: U6.4 X-NORTH.119
N35_P: U6.3 X-NORTH.117
N36_N: X-NORTH.124
N36_P: X-NORTH.122
N37_N: U5.3 X-NORTH.125
N37_P: U5.4 X-NORTH.123
N38_N: U6.2 X-NORTH.130
N38_P: U6.1 X-NORTH.128
N39_N: U5.1 X-NORTH.131
N39_P: U5.2 X-NORTH.129
N$1: R1X.2 R2X.1 UEP.7
N$5: C60.1 SENSOR.G2
N$6: C61.1 SENSOR.F1
N$11: C62.1 SENSOR.C1
N$12: C63.1 SENSOR.D4
N$15: C64.1 SENSOR.C29
N$16: C71.1 SENSOR.C4
N$17: C14.1 SENSOR.A4
N$18: C15.1 SENSOR.D5
N$19: R21.1 R22.2 U3.5
N$21: C18.1 SENSOR.C5
N$22: C19.1 SENSOR.D6
N$23: C20.1 SENSOR.B30
N$24: C21.1 SENSOR.C30
N$25: C22.2 SENSOR.F2
N$26: C23.2 SENSOR.B1
N$27: C24.2 SENSOR.B29
N$28: C25.2 SENSOR.C6
N$29: C26.2 SENSOR.D1
N$30: C27.2 SENSOR.F3
N$31: C28.2 SENSOR.H3
N$32: C29.1 SENSOR.A3
N$33: C30.1 SENSOR.B3
N$38: SENSOR.F4
N$39: SENSOR.E4
N$40: SENSOR.H4
N$41: SENSOR.G3
N$42: SENSOR.A2
N$48: TP9.TP U6.9
N$172: R11.2 R12.1 USE.6
N$173: R5.2 R6.1 UNN.6
N$182: R8.2 R9.1 UNE.6
N$183: R10.2 R11.1 USE.3
N$188: R7.2 R8.1 UNE.3
N$191: R1.2 R2.1 UNW.3
N$192: R2.2 R3.1 UNW.6
N$193: R14.2 R15.1 USS.6
N$194: R13.2 R14.1 USS.3
N$195: R16.2 R17.1 USW.3
N$196: R17.2 R18.1 USW.6
N_CHK_EN: X-NORTH.8
N_CHK_V: C2.1 C3.1 C4.1 R19.1 TP1.TP UNE.8 UNN.8 UNW.8 X-NORTH.10
N_I2C_EN: X-NORTH.137
N_I2C_V: C1.1 R1X.1 UEP.8 X-NORTH.135
N_REF: R19.2 TP2.TP U1.1 U1.3 UNE.2 UNE.5 UNN.2 UNN.5 UNW.2 UNW.5
N_SCK: U4.2 X-NORTH.144
N_SCL: UEP.6 X-NORTH.143
N_SDA: UEP.5 X-NORTH.141
N_SDI: U4.3 X-NORTH.140
N_SDO: U4.1 X-NORTH.142
N_SPI_EN: U4.4 X-NORTH.136
N_SPI_V: C59.1 U4.6 U4.14 U4.15 U4.16 X-NORTH.134
N_VE: C50.1 C51.1 C52.1 C53.1 C54.1 C55.1 C56.1 C67.1 C69.1 C75.1 C76.1 C77.1 C84.1 C85.1 C86.1 C93.1 SENSOR.C26 SENSOR.C27 SENSOR.D3 SENSOR.D26 SENSOR.E26 SENSOR.F5 SENSOR.F26 SENSOR.Z12 TP7.TP U4.13 U5.13 U6.13 X-NORTH.109 X-NORTH.115 X-NORTH.121 X-NORTH.127 X-NORTH.133
N_VE_CV: C10.1 R7.1 X-NORTH.6
N_VE_OV: UNE.7 X-NORTH.5
N_VE_UV: UNE.1 X-NORTH.11
N_VN: C31.1 C32.1 C33.1 C34.1 C35.1 C36.1 C37.1 C38.1 C39.1 C40.1 C41.1 C42.1 C43.1 C44.1 C68.1 C70.1 C78.1 C79.1 C80.1 C87.1 C88.1 C89.1 SENSOR.A10 SENSOR.A15 SENSOR.A16 SENSOR.A22 SENSOR.A26 SENSOR.A27 SENSOR.B4 SENSOR.E1 SENSOR.H5 SENSOR.H10 SENSOR.H15 SENSOR.H16 SENSOR.H22 SENSOR.H26 TP5.TP U5.5 U5.14 U5.15 U5.16 U6.5 U6.6 U6.14 U6.15 X-NORTH.49 X-NORTH.55 X-NORTH.61 X-NORTH.67 X-NORTH.73 X-NORTH.79 X-NORTH.85 X-NORTH.91 X-NORTH.97
N_VN_CV: C9.1 R4.1 X-NORTH.4
N_VN_OV: UNN.7 X-NORTH.3
N_VN_UV: UNN.1 X-NORTH.9
N_VW: C57.1 C58.1 C92.1 SENSOR.E2 SENSOR.G4 TP8.TP X-NORTH.13 X-NORTH.19 X-NORTH.25 X-NORTH.31 X-NORTH.37
N_VW_CV: C8.1 R1.1 X-NORTH.2
N_VW_OV: UNW.7 X-NORTH.1
N_VW_UV: UNW.1 X-NORTH.7
R5: R4.2 R5.1 UNN.3
S00_N: X-SOUTH.16
S00_P: X-SOUTH.14
S01_N: X-SOUTH.17
S01_P: X-SOUTH.15
S02_N: X-SOUTH.22
S02_P: X-SOUTH.20
S03_N: X-SOUTH.23
S03_P: X-SOUTH.21
S04_N: SENSOR.C24 X-SOUTH.28
S04_P: SENSOR.C25 X-SOUTH.26
S05_N: X-SOUTH.29
S05_P: X-SOUTH.27
S06_N: SENSOR.D23 X-SOUTH.34
S06_P: SENSOR.D24 X-SOUTH.32
S07_N: SENSOR.B24 X-SOUTH.35
S07_P: SENSOR.B25 X-SOUTH.33
S08_N: SENSOR.D21 X-SOUTH.40
S08_P: SENSOR.D22 X-SOUTH.38
S09_N: SENSOR.A23 X-SOUTH.41
S09_P: SENSOR.A24 X-SOUTH.39
S10_N: SENSOR.C21 X-SOUTH.46
S10_P: SENSOR.C22 X-SOUTH.44
S11_N: SENSOR.B20 X-SOUTH.47
S11_P: SENSOR.B21 X-SOUTH.45
S12_N: SENSOR.D19 X-SOUTH.52
S12_P: SENSOR.D20 X-SOUTH.50
S13_N: SENSOR.A19 X-SOUTH.53
S13_P: SENSOR.A20 X-SOUTH.51
S14_N: SENSOR.C19 X-SOUTH.58
S14_P: SENSOR.C20 X-SOUTH.56
S15_N: SENSOR.B18 X-SOUTH.59
S15_P: SENSOR.B19 X-SOUTH.57
S16_N: SENSOR.C17 X-SOUTH.64
S16_P: SENSOR.C18 X-SOUTH.62
S17_N: SENSOR.A17 X-SOUTH.65
S17_P: SENSOR.A18 X-SOUTH.63
S18_N: SENSOR.D17 X-SOUTH.70
S18_P: SENSOR.D18 X-SOUTH.68
S19_N: SENSOR.B16 X-SOUTH.71
S19_P: SENSOR.B17 X-SOUTH.69
S20_N: SENSOR.D15 X-SOUTH.76
S20_P: SENSOR.D16 X-SOUTH.74
S21_N: SENSOR.B14 X-SOUTH.77
S21_P: SENSOR.B15 X-SOUTH.75
S22_N: SENSOR.D13 X-SOUTH.82
S22_P: SENSOR.D14 X-SOUTH.80
S23_N: SENSOR.A13 X-SOUTH.83
S23_P: SENSOR.A14 X-SOUTH.81
S24_N: SENSOR.C13 X-SOUTH.88
S24_P: SENSOR.C14 X-SOUTH.86
S25_N: SENSOR.B12 X-SOUTH.89
S25_P: SENSOR.B13 X-SOUTH.87
S26_N: SENSOR.D11 X-SOUTH.94
S26_P: SENSOR.D12 X-SOUTH.92
S27_N: SENSOR.A11 X-SOUTH.95
S27_P: SENSOR.A12 X-SOUTH.93
S28_N: SENSOR.C11 X-SOUTH.100
S28_P: SENSOR.C12 X-SOUTH.98
S29_N: SENSOR.B10 X-SOUTH.101
S29_P: SENSOR.B11 X-SOUTH.99
S30_N: SENSOR.C9 X-SOUTH.106
S30_P: SENSOR.C10 X-SOUTH.104
S31_N: SENSOR.B8 X-SOUTH.107
S31_P: SENSOR.B9 X-SOUTH.105
S32_N: SENSOR.D9 X-SOUTH.112
S32_P: SENSOR.D10 X-SOUTH.110
S33_N: SENSOR.A7 X-SOUTH.113
S33_P: SENSOR.A8 X-SOUTH.111
S34_N: SENSOR.C7 X-SOUTH.118
S34_P: SENSOR.C8 X-SOUTH.116
S35_N: SENSOR.B6 X-SOUTH.119
S35_P: SENSOR.B7 X-SOUTH.117
S36_N: SENSOR.D7 X-SOUTH.124
S36_P: SENSOR.D8 X-SOUTH.122
S37_N: SENSOR.A5 X-SOUTH.125
S37_P: SENSOR.A6 X-SOUTH.123
S38_N: X-SOUTH.130
S38_P: X-SOUTH.128
S39_N: U3.6 X-SOUTH.131
S39_P: X-SOUTH.129
S_CHK_EN: X-SOUTH.8
S_CHK_V: C5.1 C6.1 C7.1 R20.1 TP3.TP USE.8 USS.8 USW.8 X-SOUTH.10
S_I2C_EN: X-SOUTH.137
S_I2C_V: U7.8 X-SOUTH.135
S_REF: R20.2 TP4.TP U2.1 U2.3 USE.2 USE.5 USS.2 USS.5 USW.2 USW.5
S_SCK: X-SOUTH.144
S_SCL: U7.2 X-SOUTH.143
S_SDA: U7.1 X-SOUTH.141
S_SDI: X-SOUTH.140
S_SDO: X-SOUTH.142
S_SPI_EN: X-SOUTH.136
S_SPI_V: X-SOUTH.134
S_VE: X-SOUTH.13 X-SOUTH.19 X-SOUTH.25 X-SOUTH.31 X-SOUTH.37
S_VE_CV: C11.1 R10.1 X-SOUTH.2
S_VE_OV: USE.7 X-SOUTH.1
S_VE_UV: USE.1 X-SOUTH.7
S_VS: C45.1 C46.1 C47.1 C48.1 C49.1 C72.1 C73.1 C74.1 C81.1 C82.1 C83.1 SENSOR.A30 SENSOR.D28 SENSOR.D30 SENSOR.G1 SENSOR.H28 SENSOR.Y21 SENSOR.Z1 SENSOR.Z2 SENSOR.Z3 SENSOR.Z4 TP6.TP X-SOUTH.49 X-SOUTH.55 X-SOUTH.61 X-SOUTH.67 X-SOUTH.73 X-SOUTH.79 X-SOUTH.85 X-SOUTH.91 X-SOUTH.97
S_VS_CV: C12.1 R13.1 X-SOUTH.4
S_VS_OV: USS.7 X-SOUTH.3
S_VS_UV: USS.1 X-SOUTH.9
S_VW: C90.1 U3.1 U3.3 X-SOUTH.109 X-SOUTH.115 X-SOUTH.121 X-SOUTH.127 X-SOUTH.133
S_VW_CV: C13.1 R16.1 X-SOUTH.6
S_VW_OV: USW.7 X-SOUTH.5
S_VW_UV: USW.1 X-SOUTH.11
SPI_CLK: SENSOR.H29 SENSOR.Z10 U4.11
SPI_EN: SENSOR.F28 U4.9
SPI_IN: SENSOR.E28 SENSOR.Y23 SENSOR.Z11 U4.12
SPI_OUT: SENSOR.G28 U4.10
SYS_RES_N: SENSOR.F30 U5.10
T_EXP1: SENSOR.H30 U5.12
T_EXP2: SENSOR.E29 SENSOR.Y24 SENSOR.Z5 SENSOR.Z6 SENSOR.Z13 U6.10
TDIG1: SENSOR.G27 SENSOR.Z8 U5.9
TDIG2: SENSOR.G26 SENSOR.Z7 U6.11
VRAMP1: C16.1 R23.1 SENSOR.G29 SENSOR.Z9
VRAMP2: C17.1 R23.2 SENSOR.F29
VTREF: C65.1 C91.2 R21.2 R24.1 SENSOR.B2 U3.4
VTSIG: C66.1 R24.2 SENSOR.C2

## Tracks (layer width: path | path; a pad name or v marks a point on that pad's centre or on a via)
CLK_IN  (via drill 0.25, 0.25 pad 0.25)
  Top 0.152: v48.64,35.62 48.64,38.05 arc45 48.45,38.5 47.91,39.05 arc45 47.46,39.23 arc-45 47.01,39.42 46.75,39.68 arc45 46.3,39.87 SENSOR.E30
  Bottom 0.152: U6.12 48.77,35.15 arc-90 48.64,35.28 v48.64,35.62
  other vias: 46.19,39.87
FRAME_REQ  (via drill 0.25, 0.25 pad 0.25)
  Top 0.152: 46.22,42.41 SENSOR.G30 46.3,42.41 arc-45 46.75,42.22 47.01,41.96 arc45 47.46,41.77 arc-90 48.09,41.14 48.09,40.89 arc45 48.28,40.45 49.87,38.86 arc45 50.32,38.67 v50.8,38.67
  Bottom 0.152: v50.8,38.67 50.84,38.63 arc45 51.02,38.56 U5.11
  other vias: 46.19,42.41
GND  (via drill 0.25, 0.25 pad 0.25, 2.6 pad 3.81)
  Bottom 0.152: X-NORTH.139 v45.33,54.61 | X-SOUTH.139 v11.82,2.54
  other vias: 1.27,55.88 1.27,1.27 0.63,3.18 0.63,5.71 0.63,8.25 0.63,10.79 0.63,13.33 0.63,15.88 0.63,18.41 0.63,20.95 0.63,23.49 0.63,26.04 0.63,28.57 0.63,31.11 0.63,33.66 0.63,36.2 0.63,38.73 0.63,41.27 0.63,43.81 0.63,46.36 0.63,48.89 0.63,51.44 0.63,53.97 56.52,3.18 56.52,5.71 56.52,8.25 56.52,10.79 56.52,13.33 56.52,15.88 56.52,18.41 56.52,20.95 56.52,23.49 56.52,26.04 56.52,28.57 56.52,31.11 56.52,33.66 56.52,36.2 56.52,38.73 56.52,41.27 56.52,43.81 56.52,46.36 56.52,48.89 56.52,51.44 56.52,53.97 55.88,55.88 53.97,56.52 51.44,56.52 48.89,56.52 46.36,56.52 43.81,56.52 41.27,56.52 38.73,56.52 36.2,56.52 33.66,56.52 31.11,56.52 28.57,56.52 26.04,56.52 23.49,56.52 20.95,56.52 18.41,56.52 15.88,56.52 13.33,56.52 10.79,56.52 8.25,56.52 5.71,56.52 3.18,56.52 53.97,0.63 51.44,0.63 48.89,0.63 46.36,0.63 43.81,0.63 41.27,0.63 38.73,0.63 36.2,0.63 33.66,0.63 31.11,0.63 28.57,0.63 26.04,0.63 23.49,0.63 20.95,0.63 18.41,0.63 15.88,0.63 13.33,0.63 10.79,0.63 8.25,0.63 5.71,0.63 3.18,0.63 55.88,1.27 15.71,46.36 16.98,46.36 18.25,46.36 19.52,46.36 14.06,46.36 20.79,46.36 22.06,46.36 23.33,46.36 24.6,46.36 25.87,46.36 27.77,46.36 29.68,46.36 30.95,46.36 32.22,46.36 33.49,46.36 33.49,44.95 34.76,44.95 32.22,44.95 30.95,44.95 29.68,44.95 25.87,44.95 24.6,44.95 23.33,44.95 22.06,44.95 19.52,44.95 18.25,44.95 16.98,44.95 15.71,44.95 38.57,44.95 39.84,44.95 37.3,44.95 14.44,13.2 15.71,13.2 16.98,13.2 18.25,13.2 19.52,13.2 20.79,11.93 22.06,13.2 23.33,13.2 24.6,13.2 25.87,13.2 27.14,11.93 28.41,11.93 29.68,13.2 30.95,13.2 32.22,13.2 33.49,13.2 34.76,13.2 36.03,11.93 37.3,13.2 38.57,13.2 39.84,13.2 37.3,10.79 38.57,10.79 39.84,10.79 34.76,10.79 33.49,10.79 32.22,10.79 30.95,10.79 29.68,10.79 25.87,10.79 24.6,10.79 23.33,10.79 22.06,10.79 19.52,10.79 18.25,10.79 16.98,10.79 15.71,10.79 14.44,10.79 42.38,46.36 43.65,46.36 11.9,46.36 13.17,46.36 13.17,37.33 14.44,37.33 10.63,37.33 9.36,37.33 42.38,37.33 41.11,20.82 42.38,20.82 43.65,20.82 44.92,20.82 46.19,20.82 9.36,20.82 10.63,20.82 11.9,20.82 13.17,20.82 14.44,20.82 15.71,20.82 41.11,11.93 42.38,11.93 43.65,11.93 44.92,11.93 46.19,11.93 9.36,11.93 10.63,11.93 11.9,11.93 13.17,11.93 16.32,6.86 17.82,6.86 19.32,6.86 20.79,6.86 22.32,6.86 23.82,6.86 25.32,6.86 26.82,6.86 28.32,6.86 29.82,6.86 31.32,6.86 32.83,6.86 34.33,6.86 35.83,6.86 37.33,6.86 38.83,6.86 14.82,6.86 13.82,50.29 15.32,50.29 16.82,50.29 18.32,50.29 19.82,50.29 21.32,50.29 22.82,50.29 24.32,50.29 25.74,50.29 27.32,50.29 28.82,50.29 30.32,50.29 31.82,50.29 33.33,50.29 34.83,50.29 36.33,50.29 37.83,50.29 39.33,50.29 11.9,37.33 41.11,37.33 44.92,37.33 41.11,46.36 10.16,45.72 7.94,45.72 39.84,46.36 34.76,14.47 36.03,15.74 41.11,15.74 42.38,15.74 43.65,15.74 43.65,14.47 43.65,17.01 44.92,18.28 42.38,18.28 39.84,18.28 39.84,14.47 47.46,20.82 14.44,15.74 19.52,14.47 27.14,17.01 28.41,17.01 34.76,43.68 39.84,43.68 42.38,43.68 42.38,41.14 42.38,39.87 39.84,39.87 27.14,39.87 28.41,39.87 15.71,43.68 19.52,43.68 9.36,43.68 11.9,39.87 36.35,46.36 38.1,46.36 14.44,42.41 10.63,18.28 44.92,14.47 40.33,6.86 41.83,6.86 43.33,6.86 13.32,6.86 40.83,50.29 42.33,50.29 43.65,38.6 5.97,23.11 4.95,19.94 4.95,11.18 45.94,46.36 3.81,3.81 53.34,53.34 3.81,5.43 5.43,3.81 3.81,2.19 2.19,3.81 4.95,4.95 4.95,2.67 2.67,2.67 2.67,4.95 53.34,3.81 53.34,5.43 54.96,3.81 53.34,2.19 51.72,3.81 54.48,4.95 54.48,2.67 52.2,2.67 52.2,4.95 53.34,54.96 54.96,53.34 53.34,51.72 51.72,53.34 54.48,54.48 54.48,52.2 52.2,52.2 52.2,54.48 3.81,53.34 3.81,54.96 5.43,53.34 3.81,51.72 2.19,53.34 4.95,54.48 4.95,52.2 2.67,52.2 2.67,54.48 52.45,41.53
  pour Bottom (rank 3): 55.88,57.15 1.27,57.15 0,55.88 0,1.27 1.27,0 55.88,0 57.15,1.27 57.15,55.88
  pour Top: 55.88,57.15 1.27,57.15 0,55.88 0,1.27 1.27,0 55.88,0 57.15,1.27 57.15,55.88
  pour Route2 (rank 3): 55.88,57.15 1.27,57.15 0,55.88 0,1.27 1.27,0 55.88,0 57.15,1.27 57.15,55.88
  pour Route15 (rank 3): 55.88,57.15 1.27,57.15 0,55.88 0,1.27 1.27,0 55.88,0 57.15,1.27 57.15,55.88
N00_N  (via drill 0.25)
  Bottom 0.152: X-NORTH.16 14.32,47.69 arc45 14.51,47.24 15.03,46.73 arc-45 15.21,46.28 15.21,40.63 arc45 15.4,40.18 SENSOR.E6 15.73,39.85 R25.2
  other vias: 15.71,39.87
N00_P  (via drill 0.25)
  Bottom 0.152: X-NORTH.14 13.82,47.8 arc45 14.01,47.35 14.75,46.61 arc-45 14.93,46.16 14.93,40.63 arc-45 14.75,40.18 SENSOR.E5 14.74,39.57 arc-45 14.93,39.12 R25.1
  other vias: 14.44,39.87
N01_N  (via drill 0.25, 0.25 pad 0.25)
  Top 0.152: v14.82,50.93 14.82,50.85 arc-45 14.78,50.75 arc45 14.71,50.57 14.71,48.84 arc45 14.89,48.39 16.3,46.98 arc-45 16.48,46.53 16.48,43.17 arc45 16.67,42.72 SENSOR.G7
  Bottom 0.152: X-NORTH.17 v14.82,50.93
  other vias: 16.98,42.41
N01_P  (via drill 0.25, 0.25 pad 0.25)
  Top 0.152: v14.32,51.31 14.32,50.81 arc45 14.35,50.75 arc-45 14.43,50.57 14.43,48.72 arc45 14.61,48.27 16.02,46.86 arc-45 16.2,46.41 16.2,43.17 arc-45 16.02,42.72 SENSOR.G6
  Bottom 0.152: X-NORTH.15 v14.32,51.31
  other vias: 15.71,42.41
N02_N  (via drill 0.25)
  Bottom 0.152: X-NORTH.22 15.82,47.72 arc45 16.01,47.27 16.3,46.98 arc-45 16.48,46.53 16.48,41.9 arc45 16.67,41.45 SENSOR.F7
  other vias: 16.98,41.14
N02_P  (via drill 0.25)
  Bottom 0.152: X-NORTH.20 15.32,47.82 arc45 15.51,47.37 16.02,46.86 arc-45 16.2,46.41 16.2,41.9 arc-45 16.02,41.45 SENSOR.F6
  other vias: 15.71,41.14
N03_N  (via drill 0.25)
  Bottom 0.152: X-NORTH.23 v16.32,50.93
N03_P  (via drill 0.25)
  Bottom 0.152: X-NORTH.21 v15.82,51.31
N04_N  (via drill 0.25)
  Bottom 0.152: X-NORTH.28 17.32,47.74 arc45 17.51,47.29 17.57,47.23 arc-45 17.75,46.78 17.75,40.63 arc45 17.94,40.18 SENSOR.E8
  other vias: 18.25,39.87
N04_P  (via drill 0.25)
  Bottom 0.152: X-NORTH.26 16.82,47.84 arc45 17.01,47.4 17.29,47.12 arc-45 17.48,46.67 17.48,40.63 arc-45 17.29,40.18 SENSOR.E7
  other vias: 16.98,39.87
N05_N  (via drill 0.25, 0.25 pad 0.25)
  Top 0.152: v17.82,50.93 17.82,50.62 arc45 17.75,50.45 17.75,44.44 arc45 17.94,43.99 SENSOR.H8
  Bottom 0.152: X-NORTH.29 v17.82,50.93
  other vias: 18.25,43.68
N05_P  (via drill 0.25, 0.25 pad 0.25)
  Top 0.152: v17.32,51.31 17.32,50.8 arc45 17.4,50.62 17.4,50.62 arc-45 17.48,50.44 17.48,44.44 arc-45 17.29,43.99 SENSOR.H7
  Bottom 0.152: X-NORTH.27 v17.32,51.31
  other vias: 16.98,43.68
N06_N  (via drill 0.25)
  Bottom 0.152: X-NORTH.34 18.82,47.63 arc45 18.91,47.41 arc-45 19.02,47.14 19.02,41.9 arc45 19.21,41.45 SENSOR.F9
  other vias: 19.52,41.14
N06_P  (via drill 0.25)
  Bottom 0.152: X-NORTH.32 18.32,47.76 arc45 18.44,47.5 18.63,47.3 arc-45 18.74,47.03 18.74,41.9 arc-45 18.56,41.45 SENSOR.F8
  other vias: 18.25,41.14
N07_N  (via drill 0.25, 0.25 pad 0.25)
  Top 0.152: v19.32,50.93 arc-45 19.27,50.79 19.23,50.75 arc45 19.15,50.57 19.15,49.04 arc-45 19.1,48.91 arc45 19.02,48.73 19.02,43.17 arc45 19.21,42.72 SENSOR.G9
  Bottom 0.152: X-NORTH.35 v19.32,50.93
  other vias: 19.52,42.41
N07_P  (via drill 0.25, 0.25 pad 0.25)
  Top 0.152: v18.82,51.31 18.82,50.72 arc-45 18.87,50.61 18.87,49.15 arc-45 18.82,49.03 arc45 18.74,48.85 18.74,43.17 arc-45 18.56,42.72 SENSOR.G8
  Bottom 0.152: X-NORTH.33 v18.82,51.31
  other vias: 18.25,42.41
N08_N  (via drill 0.25)
  Bottom 0.152: X-NORTH.40 20.32,47.4 arc45 20.3,47.33 20.3,40.63 arc45 20.48,40.18 SENSOR.E10
  other vias: 20.79,39.87
N08_P  (via drill 0.25)
  Bottom 0.152: X-NORTH.38 19.82,47.72 arc45 19.94,47.45 arc-45 20.02,47.26 20.02,40.63 arc-45 19.83,40.18 SENSOR.E9
  other vias: 19.52,39.87
N09_N  (via drill 0.25, 0.25 pad 0.25)
  Top 0.152: v20.82,50.93 arc-45 20.75,50.75 20.75,50.75 arc45 20.68,50.57 20.68,48.45 arc45 20.86,48 21.38,47.49 arc-45 21.56,47.04 21.56,43.17 arc45 21.75,42.72 SENSOR.G11
  Bottom 0.152: X-NORTH.41 v20.82,50.93
  other vias: 22.06,42.41
N09_P  (via drill 0.25, 0.25 pad 0.25)
  Top 0.152: v20.32,51.31 20.32,50.74 arc-45 20.4,50.57 20.4,48.34 arc45 20.58,47.89 21.1,47.37 arc-45 21.29,46.92 21.29,43.17 arc-45 21.1,42.72 SENSOR.G10
  Bottom 0.152: X-NORTH.39 v20.32,51.31
  other vias: 20.79,42.41
N10_N  (via drill 0.25)
  Bottom 0.152: X-NORTH.46 21.82,47.73 arc-45 21.71,47.46 21.68,47.42 arc45 21.56,47.16 21.56,41.9 arc45 21.75,41.45 SENSOR.F11
  other vias: 22.06,41.14
N10_P  (via drill 0.25)
  Bottom 0.152: X-NORTH.44 21.32,47.53 arc-135 21.29,47.51 21.29,41.9 arc-45 21.1,41.45 SENSOR.F10
  other vias: 20.79,41.14
N11_N  (via drill 0.25, 0.25 pad 0.25)
  Top 0.152: v22.32,50.93 22.32,50.87 arc-45 22.27,50.75 arc45 22.2,50.57 22.2,48.84 arc45 22.39,48.39 22.65,48.12 arc-45 22.84,47.67 22.84,44.44 arc45 23.02,43.99 SENSOR.H12
  Bottom 0.152: X-NORTH.47 v22.32,50.93
  other vias: 23.33,43.68
N11_P  (via drill 0.25, 0.25 pad 0.25)
  Top 0.152: v21.82,51.31 21.82,50.8 arc45 21.85,50.75 arc-45 21.92,50.57 21.92,48.72 arc45 22.11,48.27 22.37,48.01 arc-45 22.55,47.56 22.55,44.44 arc-45 22.37,43.99 SENSOR.H11
  Bottom 0.152: X-NORTH.45 v21.82,51.31
  other vias: 22.06,43.68
N12_N  (via drill 0.25)
  Bottom 0.152: X-NORTH.52 23.32,47.71 arc-45 23.21,47.44 22.95,47.17 arc45 22.84,46.9 22.84,40.63 arc45 23.02,40.18 SENSOR.E12
  other vias: 23.33,39.87
N12_P  (via drill 0.25)
  Bottom 0.152: X-NORTH.50 22.82,47.6 arc-45 22.71,47.33 22.67,47.29 arc45 22.55,47.02 22.55,40.63 arc-45 22.37,40.18 SENSOR.E11
  other vias: 22.06,39.87
N13_N  (via drill 0.25, 0.25 pad 0.25)
  Top 0.152: v23.82,50.93 23.82,50.81 arc-45 23.8,50.75 arc45 23.72,50.57 23.72,49.22 arc45 23.91,48.77 23.92,48.76 arc-45 24.11,48.31 24.11,43.17 arc45 24.29,42.72 SENSOR.G13
  Bottom 0.152: X-NORTH.53 v23.82,50.93
  other vias: 24.6,42.41
N13_P  (via drill 0.25, 0.25 pad 0.25)
  Top 0.152: v23.32,51.31 23.32,50.86 arc45 23.37,50.75 arc-45 23.44,50.57 23.44,49.1 arc45 23.63,48.65 23.64,48.64 arc-45 23.82,48.19 23.82,43.17 arc-45 23.64,42.72 SENSOR.G12
  Bottom 0.152: X-NORTH.51 v23.32,51.31
  other vias: 23.33,42.41
N14_N  (via drill 0.25)
  Bottom 0.152: X-NORTH.58 24.82,47.79 arc-45 24.64,47.34 24.29,46.99 arc45 24.11,46.54 24.11,41.9 arc45 24.29,41.45 SENSOR.F13
  other vias: 24.6,41.14
N14_P  (via drill 0.25)
  Bottom 0.152: X-NORTH.56 24.32,47.68 arc-45 24.14,47.23 24.01,47.11 arc45 23.82,46.66 23.82,41.9 arc-45 23.64,41.45 SENSOR.F12
  other vias: 23.33,41.14
N15_N  (via drill 0.25, 0.25 pad 0.25)
  Top 0.152: v25.32,50.93 25.32,50.75 arc-45 25.32,50.75 arc45 25.25,50.57 25.25,49.41 arc45 25.3,49.28 arc-45 25.38,49.1 25.38,44.44 arc45 25.56,43.99 SENSOR.H14
  Bottom 0.152: X-NORTH.59 v25.32,50.93
  other vias: 25.87,43.68
N15_P  (via drill 0.25, 0.25 pad 0.25)
  Top 0.152: v24.82,51.31 24.82,50.91 arc45 24.89,50.75 arc-45 24.97,50.57 24.97,49.29 arc45 25.02,49.17 arc-45 25.09,48.99 25.09,44.44 arc-45 24.91,43.99 SENSOR.H13
  Bottom 0.152: X-NORTH.57 v24.82,51.31
  other vias: 24.6,43.68
N16_N  (via drill 0.25)
  Bottom 0.152: X-NORTH.64 26.32,47.76 arc-45 26.14,47.31 25.56,46.74 arc45 25.38,46.29 25.38,40.63 arc45 25.56,40.18 SENSOR.E14
  other vias: 25.87,39.87
N16_P  (via drill 0.25)
  Bottom 0.152: X-NORTH.62 25.82,47.66 arc-45 25.64,47.21 25.28,46.85 arc45 25.09,46.4 25.09,40.63 arc-45 24.91,40.18 SENSOR.E13
  other vias: 24.6,39.87
N17_N  (via drill 0.25, 0.25 pad 0.25)
  Top 0.152: v26.82,50.93 arc-45 26.77,50.8 26.72,50.75 arc45 26.64,50.57 26.64,43.17 arc45 26.83,42.72 SENSOR.G15
  Bottom 0.152: X-NORTH.65 v26.82,50.93
  other vias: 27.14,42.41
N17_P  (via drill 0.25, 0.25 pad 0.25)
  Top 0.152: v26.32,51.31 26.32,50.71 arc-45 26.36,50.62 26.36,43.17 arc-45 26.18,42.72 SENSOR.G14
  Bottom 0.152: X-NORTH.63 v26.32,51.31
  other vias: 25.87,42.41
N18_N  (via drill 0.25)
  Bottom 0.152: X-NORTH.70 27.82,47.74 arc-45 27.64,47.29 26.83,46.48 arc45 26.64,46.03 26.64,41.9 arc45 26.83,41.45 SENSOR.F15
  other vias: 27.14,41.14
N18_P  (via drill 0.25)
  Bottom 0.152: X-NORTH.68 27.32,47.64 arc-45 27.14,47.19 26.55,46.6 arc45 26.36,46.15 26.36,41.9 arc-45 26.18,41.45 SENSOR.F14
  other vias: 25.87,41.14
N19_N  (via drill 0.25, 0.25 pad 0.25)
  Top 0.152: v28.32,50.93 arc-45 28.26,50.76 28.24,50.75 arc45 28.17,50.57 28.17,48.45 arc45 28.36,48 29,47.36 arc-45 29.18,46.91 29.18,43.17 arc45 29.37,42.72 SENSOR.G17
  Bottom 0.152: X-NORTH.71 v28.32,50.93
  other vias: 29.68,42.41
N19_P  (via drill 0.25, 0.25 pad 0.25)
  Top 0.152: v27.82,51.31 27.82,50.74 arc-45 27.89,50.58 27.89,48.34 arc45 28.07,47.89 28.72,47.25 arc-45 28.9,46.8 28.9,43.17 arc-45 28.72,42.72 SENSOR.G16
  Bottom 0.152: X-NORTH.69 v27.82,51.31
  other vias: 28.41,42.41
N20_N  (via drill 0.25)
  Bottom 0.152: X-NORTH.76 29.32,47.61 arc-45 29.26,47.45 arc45 29.18,47.27 29.18,41.9 arc45 29.37,41.45 SENSOR.F17
  other vias: 29.68,41.14
N20_P  (via drill 0.25)
  Bottom 0.152: X-NORTH.74 28.82,47.46 arc45 28.83,47.45 arc-45 28.9,47.27 28.9,41.9 arc-45 28.72,41.45 SENSOR.F16
  other vias: 28.41,41.14
N21_N  (via drill 0.25, 0.25 pad 0.25)
  Top 0.152: v29.82,50.93 29.82,50.89 arc-45 29.77,50.75 arc45 29.69,50.57 29.69,48.84 arc45 29.88,48.39 30.27,48 arc-45 30.45,47.55 30.45,44.44 arc45 30.64,43.99 SENSOR.H18
  Bottom 0.152: X-NORTH.77 29.82,50.98 v29.82,50.93
  other vias: 30.95,43.68
N21_P  (via drill 0.25, 0.25 pad 0.25)
  Top 0.152: v29.32,51.31 29.32,50.78 arc45 29.34,50.75 arc-45 29.41,50.57 29.41,48.72 arc45 29.6,48.27 29.99,47.88 arc-45 30.18,47.43 30.18,44.44 arc-45 29.99,43.99 SENSOR.H17
  Bottom 0.152: X-NORTH.75 29.32,51.36 v29.32,51.31
  other vias: 29.68,43.68
N22_N  (via drill 0.25)
  Bottom 0.152: X-NORTH.82 30.82,47.71 arc-45 30.71,47.45 30.57,47.3 arc45 30.45,47.03 30.45,40.63 arc45 30.64,40.18 SENSOR.E18
  other vias: 30.95,39.87
N22_P  (via drill 0.25)
  Bottom 0.152: X-NORTH.80 30.32,47.56 arc-45 30.25,47.38 30.25,47.38 arc45 30.18,47.2 30.18,40.63 arc-45 29.99,40.18 SENSOR.E17
  other vias: 29.68,39.87
N23_N  (via drill 0.25, 0.25 pad 0.25)
  Top 0.152: v31.32,50.93 31.32,50.83 arc-45 31.29,50.75 arc45 31.22,50.57 31.22,49.22 arc45 31.4,48.77 31.54,48.63 arc-45 31.72,48.18 31.72,43.17 arc45 31.91,42.72 SENSOR.G19
  Bottom 0.152: X-NORTH.83 31.32,50.98 v31.32,50.93
  other vias: 32.22,42.41
N23_P  (via drill 0.25, 0.25 pad 0.25)
  Top 0.152: v30.82,51.31 30.82,50.84 arc45 30.86,50.75 arc-45 30.94,50.57 30.94,49.1 arc45 31.12,48.65 31.26,48.52 arc-45 31.45,48.07 31.45,43.17 arc-45 31.26,42.72 SENSOR.G18
  Bottom 0.152: X-NORTH.81 30.82,51.36 v30.82,51.31
  other vias: 30.95,42.41
N24_N  (via drill 0.25)
  Bottom 0.152: X-NORTH.88 32.33,47.8 arc-45 32.14,47.35 31.91,47.12 arc45 31.72,46.67 31.72,41.9 arc45 31.91,41.45 SENSOR.F19
  other vias: 32.22,41.14
N24_P  (via drill 0.25)
  Bottom 0.152: X-NORTH.86 31.82,47.69 arc-45 31.64,47.24 31.63,47.23 arc45 31.45,46.78 31.45,41.9 arc-45 31.26,41.45 SENSOR.F18
  other vias: 30.95,41.14
N25_N  (via drill 0.25, 0.25 pad 0.25)
  Top 0.152: v32.83,50.93 32.83,50.77 arc-45 32.81,50.75 arc45 32.74,50.57 32.74,49.44 arc45 32.81,49.26 32.92,49.15 arc-45 32.99,48.97 32.99,44.44 arc45 33.18,43.99 SENSOR.H20
  Bottom 0.152: X-NORTH.89 32.83,50.98 v32.83,50.93
  other vias: 33.49,43.68
N25_P  (via drill 0.25, 0.25 pad 0.25)
  Top 0.152: v32.33,51.31 32.33,50.9 arc45 32.39,50.75 arc-45 32.46,50.57 32.46,49.32 arc45 32.54,49.14 32.64,49.04 arc-45 32.71,48.86 32.71,44.44 arc-45 32.53,43.99 SENSOR.H19
  Bottom 0.152: X-NORTH.87 32.33,51.36 v32.33,51.31
  other vias: 32.22,43.68
N26_N  (via drill 0.25)
  Bottom 0.152: X-NORTH.94 33.83,47.77 arc-45 33.64,47.32 33.18,46.86 arc45 32.99,46.41 32.99,40.63 arc45 33.18,40.18 SENSOR.E20
  other vias: 33.49,39.87
N26_P  (via drill 0.25)
  Bottom 0.152: X-NORTH.92 33.33,47.67 arc-45 33.14,47.22 32.9,46.98 arc45 32.71,46.53 32.71,40.63 arc-45 32.53,40.18 SENSOR.E19
  other vias: 32.22,39.87
N27_N  (via drill 0.25, 0.25 pad 0.25)
  Top 0.152: v34.33,50.93 arc-45 34.28,50.81 34.21,50.75 arc45 34.14,50.57 34.14,49.79 arc45 34.19,49.66 arc-45 34.27,49.48 34.27,43.17 arc45 34.45,42.72 SENSOR.G21
  Bottom 0.152: X-NORTH.95 34.33,50.98 v34.33,50.93
  other vias: 34.76,42.41
N27_P  (via drill 0.25, 0.25 pad 0.25)
  Top 0.152: v33.83,51.31 33.83,50.71 arc-45 33.86,50.63 33.86,49.67 arc45 33.91,49.55 arc-45 33.98,49.37 33.98,43.17 arc-45 33.8,42.72 SENSOR.G20
  Bottom 0.152: X-NORTH.93 33.83,51.36 v33.83,51.31
  other vias: 33.49,42.41
N28_N  (via drill 0.25)
  Bottom 0.152: X-NORTH.100 35.33,47.75 arc-45 35.14,47.3 34.45,46.61 arc45 34.27,46.16 34.27,41.9 arc45 34.45,41.45 SENSOR.F21
  other vias: 34.76,41.14
N28_P  (via drill 0.25)
  Bottom 0.152: X-NORTH.98 34.83,47.64 arc-45 34.64,47.19 34.17,46.73 arc45 33.98,46.28 33.98,41.9 arc-45 33.8,41.45 SENSOR.F20
  other vias: 33.49,41.14
N29_N  (via drill 0.25, 0.25 pad 0.25)
  Top 0.152: v35.83,50.93 arc-45 35.76,50.77 35.74,50.75 arc45 35.66,50.57 35.66,46.23 arc45 35.85,45.78 36.62,45.01 arc-45 36.8,44.56 36.8,43.17 arc45 36.99,42.72 SENSOR.G23
  Bottom 0.152: X-NORTH.101 35.83,50.98 v35.83,50.93
  other vias: 37.3,42.41
N29_P  (via drill 0.25, 0.25 pad 0.25)
  Top 0.152: v35.33,51.31 35.33,50.73 arc-45 35.38,50.59 35.38,46.12 arc45 35.57,45.67 36.34,44.9 arc-45 36.52,44.45 36.52,43.17 arc-45 36.34,42.72 SENSOR.G22
  Bottom 0.152: X-NORTH.99 35.33,51.36 v35.33,51.31
  other vias: 36.03,42.41
N30_N  (via drill 0.25)
  Bottom 0.152: X-NORTH.106 36.83,47.72 arc-45 36.64,47.27 35.72,46.36 arc45 35.53,45.91 35.53,40.63 arc45 35.72,40.18 SENSOR.E22
  other vias: 36.03,39.87
N30_P  (via drill 0.25)
  Bottom 0.152: X-NORTH.104 36.33,47.62 arc-45 36.14,47.17 35.44,46.47 arc45 35.25,46.02 35.25,40.63 arc-45 35.07,40.18 SENSOR.E21
  other vias: 34.76,39.87
N31_N  (via drill 0.25, 0.25 pad 0.25)
  Top 0.152: v37.33,50.93 37.33,50.9 arc-45 37.26,50.75 arc45 37.19,50.57 37.19,46.61 arc45 37.37,46.16 37.89,45.65 arc-45 38.08,45.2 38.08,44.44 arc45 38.26,43.99 SENSOR.H24
  Bottom 0.152: X-NORTH.107 37.33,50.98 v37.33,50.93
  other vias: 38.57,43.68
N31_P  (via drill 0.25, 0.25 pad 0.25)
  Top 0.152: v36.83,51.31 36.83,50.76 arc45 36.83,50.75 arc-45 36.91,50.57 36.91,46.5 arc45 37.09,46.05 37.61,45.53 arc-45 37.8,45.08 37.8,44.44 arc-45 37.61,43.99 SENSOR.H23
  Bottom 0.152: X-NORTH.105 36.83,51.36 v36.83,51.31
  other vias: 37.3,43.68
N32_N  (via drill 0.25)
  Bottom 0.152: X-NORTH.112 38.33,47.51 arc-45 38.14,47.06 36.99,45.91 arc45 36.8,45.46 36.8,41.9 arc45 36.99,41.45 SENSOR.F23
  other vias: 37.3,41.14
N32_P  (via drill 0.25)
  Bottom 0.152: X-NORTH.110 37.83,47.4 arc-45 37.64,46.95 36.71,46.03 arc45 36.52,45.58 36.52,41.9 arc-45 36.34,41.45 SENSOR.F22
  other vias: 36.03,41.14
N33_N  (via drill 0.25, 0.25 pad 0.25)
  Top 0.152: v38.83,50.93 38.83,50.85 arc-45 38.78,50.75 arc45 38.71,50.57 38.71,46.99 arc45 38.9,46.54 39.16,46.28 arc-45 39.34,45.83 39.34,43.17 arc45 39.53,42.72 SENSOR.G25
  Bottom 0.152: X-NORTH.113 38.83,50.98 v38.83,50.93
  other vias: 39.84,42.41
N33_P  (via drill 0.25, 0.25 pad 0.25)
  Top 0.152: v38.33,51.31 38.33,50.82 arc45 38.36,50.75 arc-45 38.43,50.57 38.43,46.88 arc45 38.62,46.43 38.88,46.17 arc-45 39.06,45.72 39.06,43.17 arc-45 38.88,42.72 SENSOR.G24
  Bottom 0.152: X-NORTH.111 38.33,51.36 v38.33,51.31
  other vias: 38.57,42.41
N34_N  (via drill 0.25)
  Bottom 0.152: X-NORTH.118 39.83,47.23 arc-45 39.64,46.78 38.26,45.4 arc45 38.08,44.95 38.08,40.63 arc45 38.26,40.18 SENSOR.E24
  other vias: 38.57,39.87
N34_P  (via drill 0.25)
  Bottom 0.152: X-NORTH.116 39.33,47.13 arc-45 39.14,46.68 37.98,45.52 arc45 37.8,45.07 37.8,40.63 arc-45 37.61,40.18 SENSOR.E23
  other vias: 37.3,39.87
N35_N  (via drill 0.25)
  Top 0.152: v51.69,33.59 52.77,34.68 arc45 52.96,35.12 52.96,37.08 arc45 52.77,37.52 52.64,37.66 arc-45 52.45,38.11 52.45,40 arc45 52.27,40.45 51.2,41.51 arc-45 51.02,41.96 51.02,42.7 arc45 50.83,43.15 46.16,47.82 arc45 45.71,48.01 43.66,48.01 arc-45 43.21,48.19 42.57,48.84 arc45 42.12,49.02 41.5,49.02 arc-45 41.23,49.13 40.44,49.93 arc-45 40.33,50.2 v40.33,50.9
  Bottom 0.152: X-NORTH.119 v40.33,50.9 | U6.4 51.24,33.93 arc-45 51.42,33.86 v51.69,33.59
N35_P  (via drill 0.25)